# Altium PCB нижняя плата версия 5.PcbDoc
Units mm, origin at the board's own origin, x right, y up, seen from the top; angles counter-clockwise.
Board outline 57.07 x 52.6 mm, 4 copper layers (Top Layer, Layer 1, Layer 2, Bottom Layer), stack 0.603 mm thick; 96 components, 99 nets, 513 pads, 141 vias.
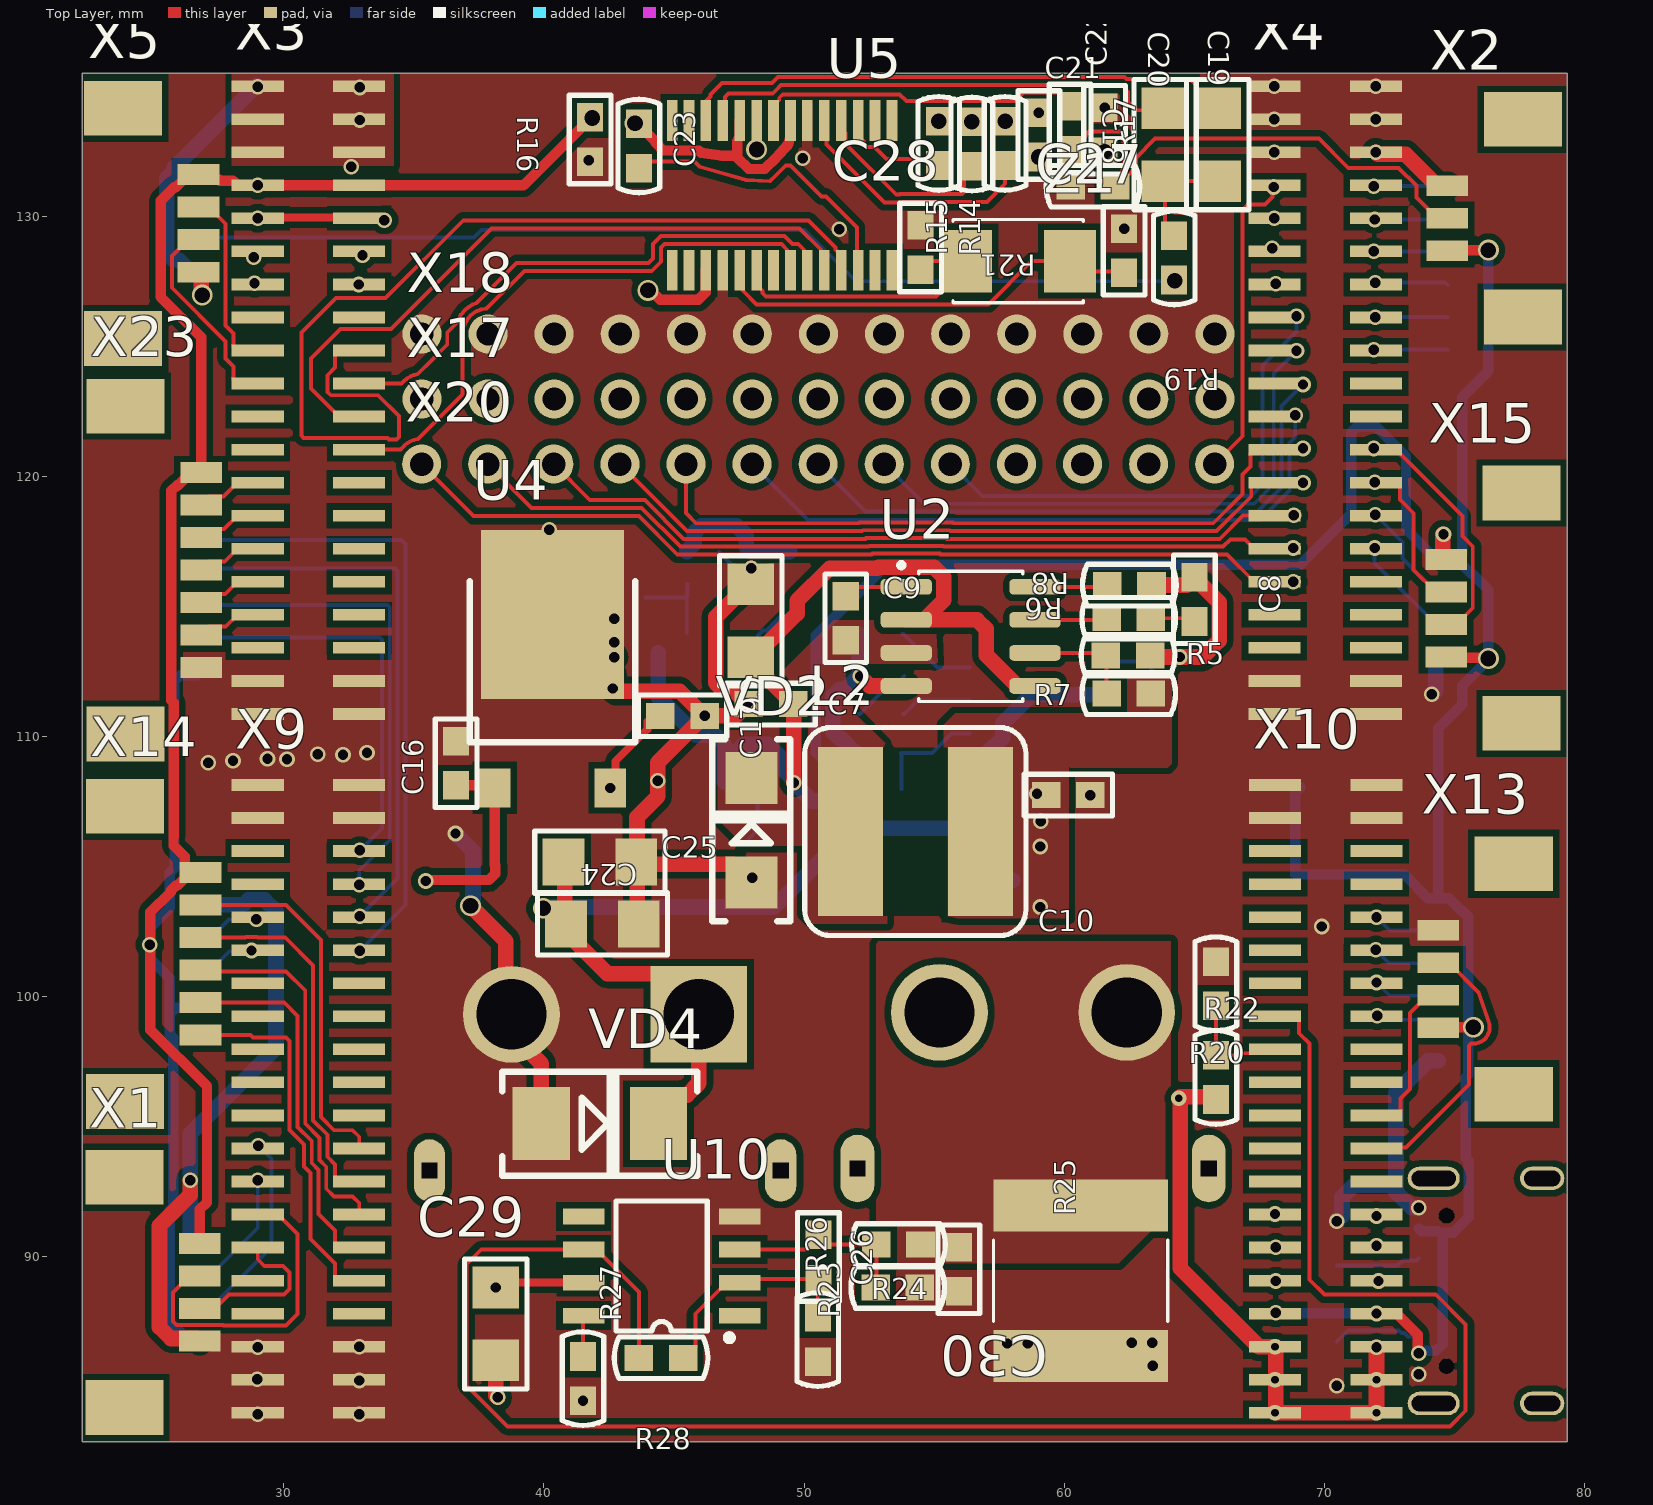
[diagram p0: Top Layer view]
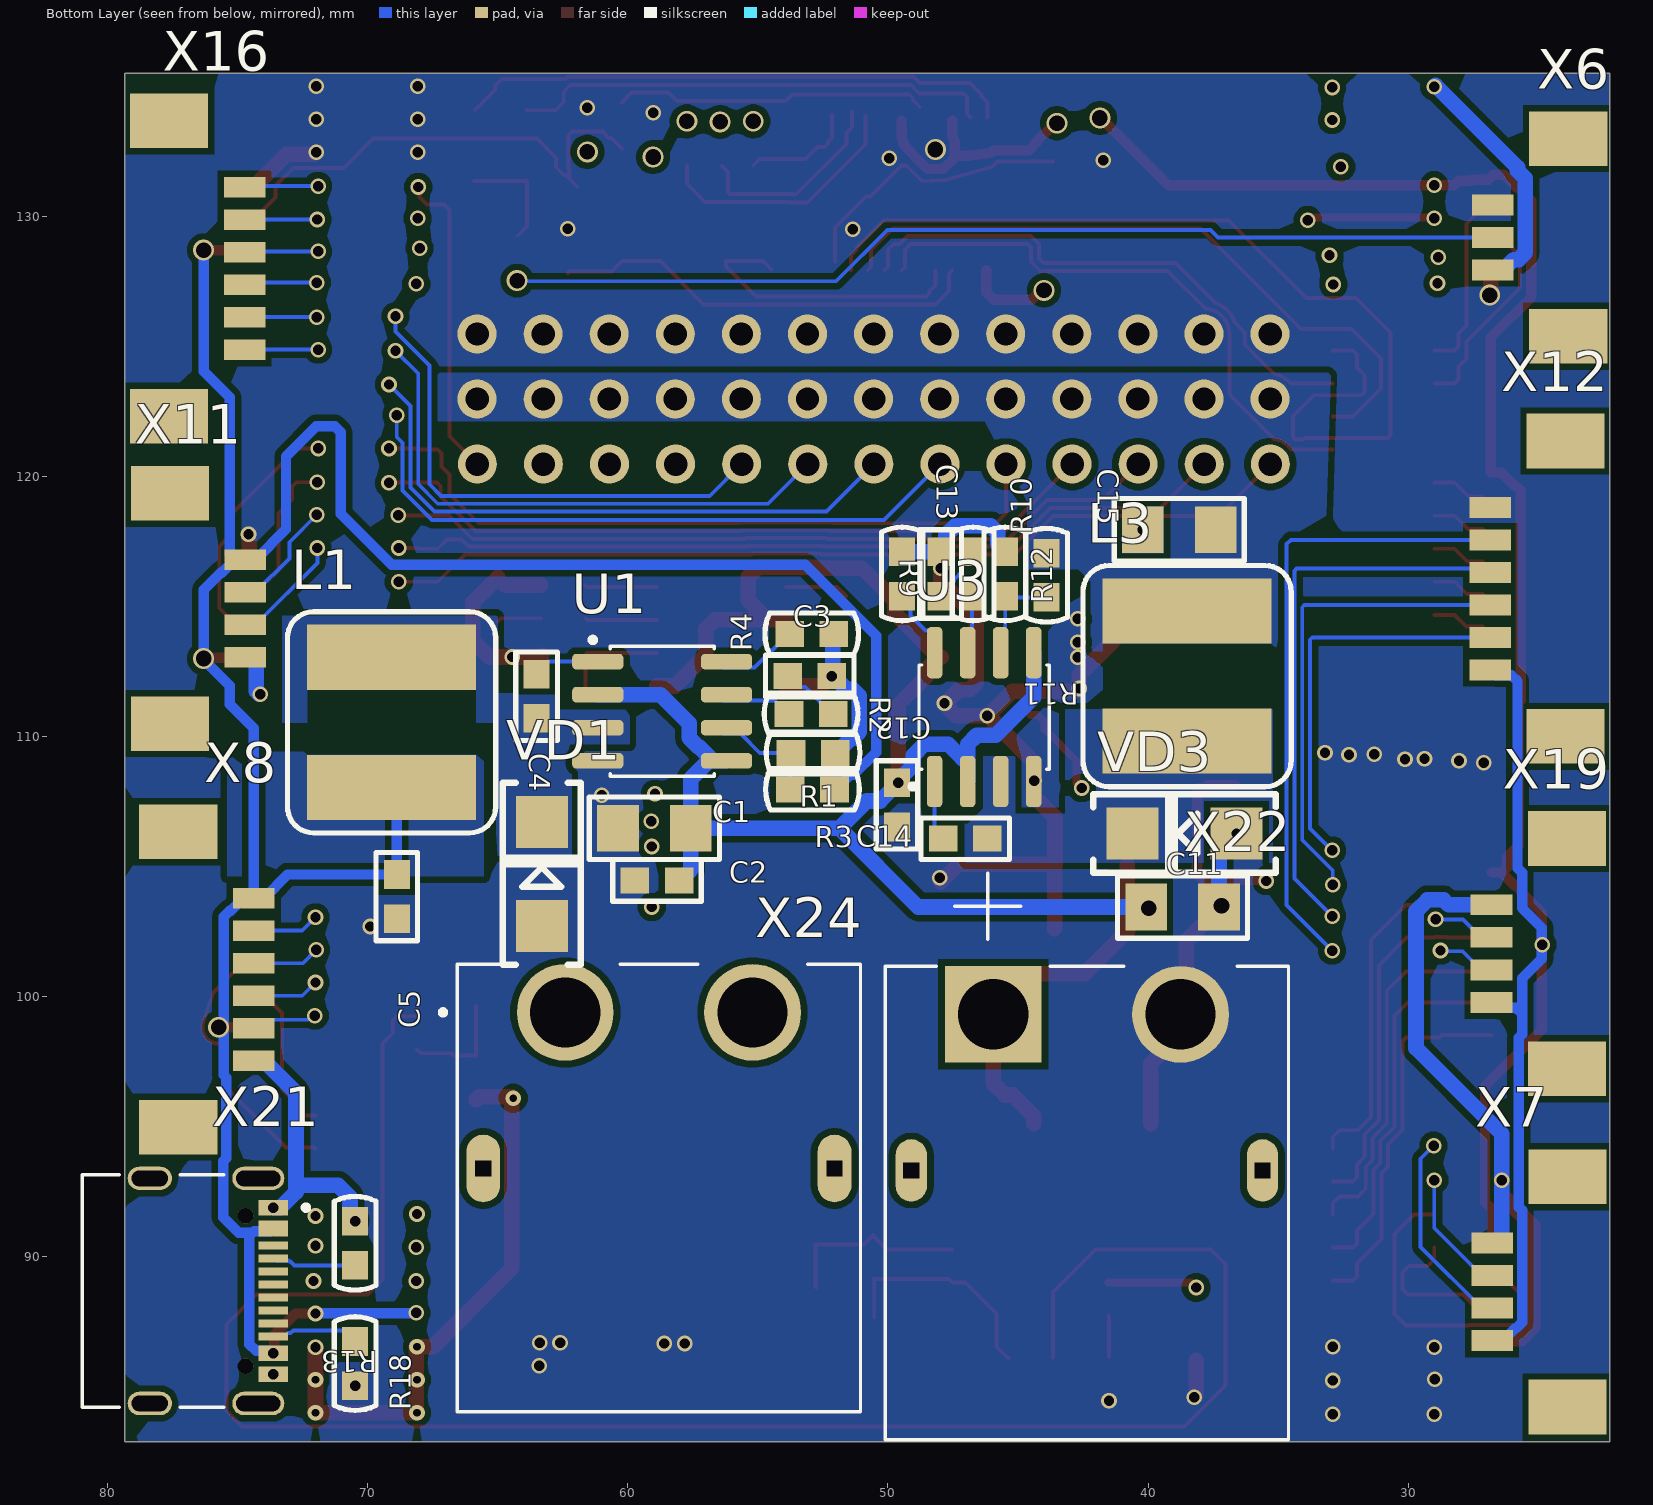
[diagram p1: Bottom Layer view, seen from below]
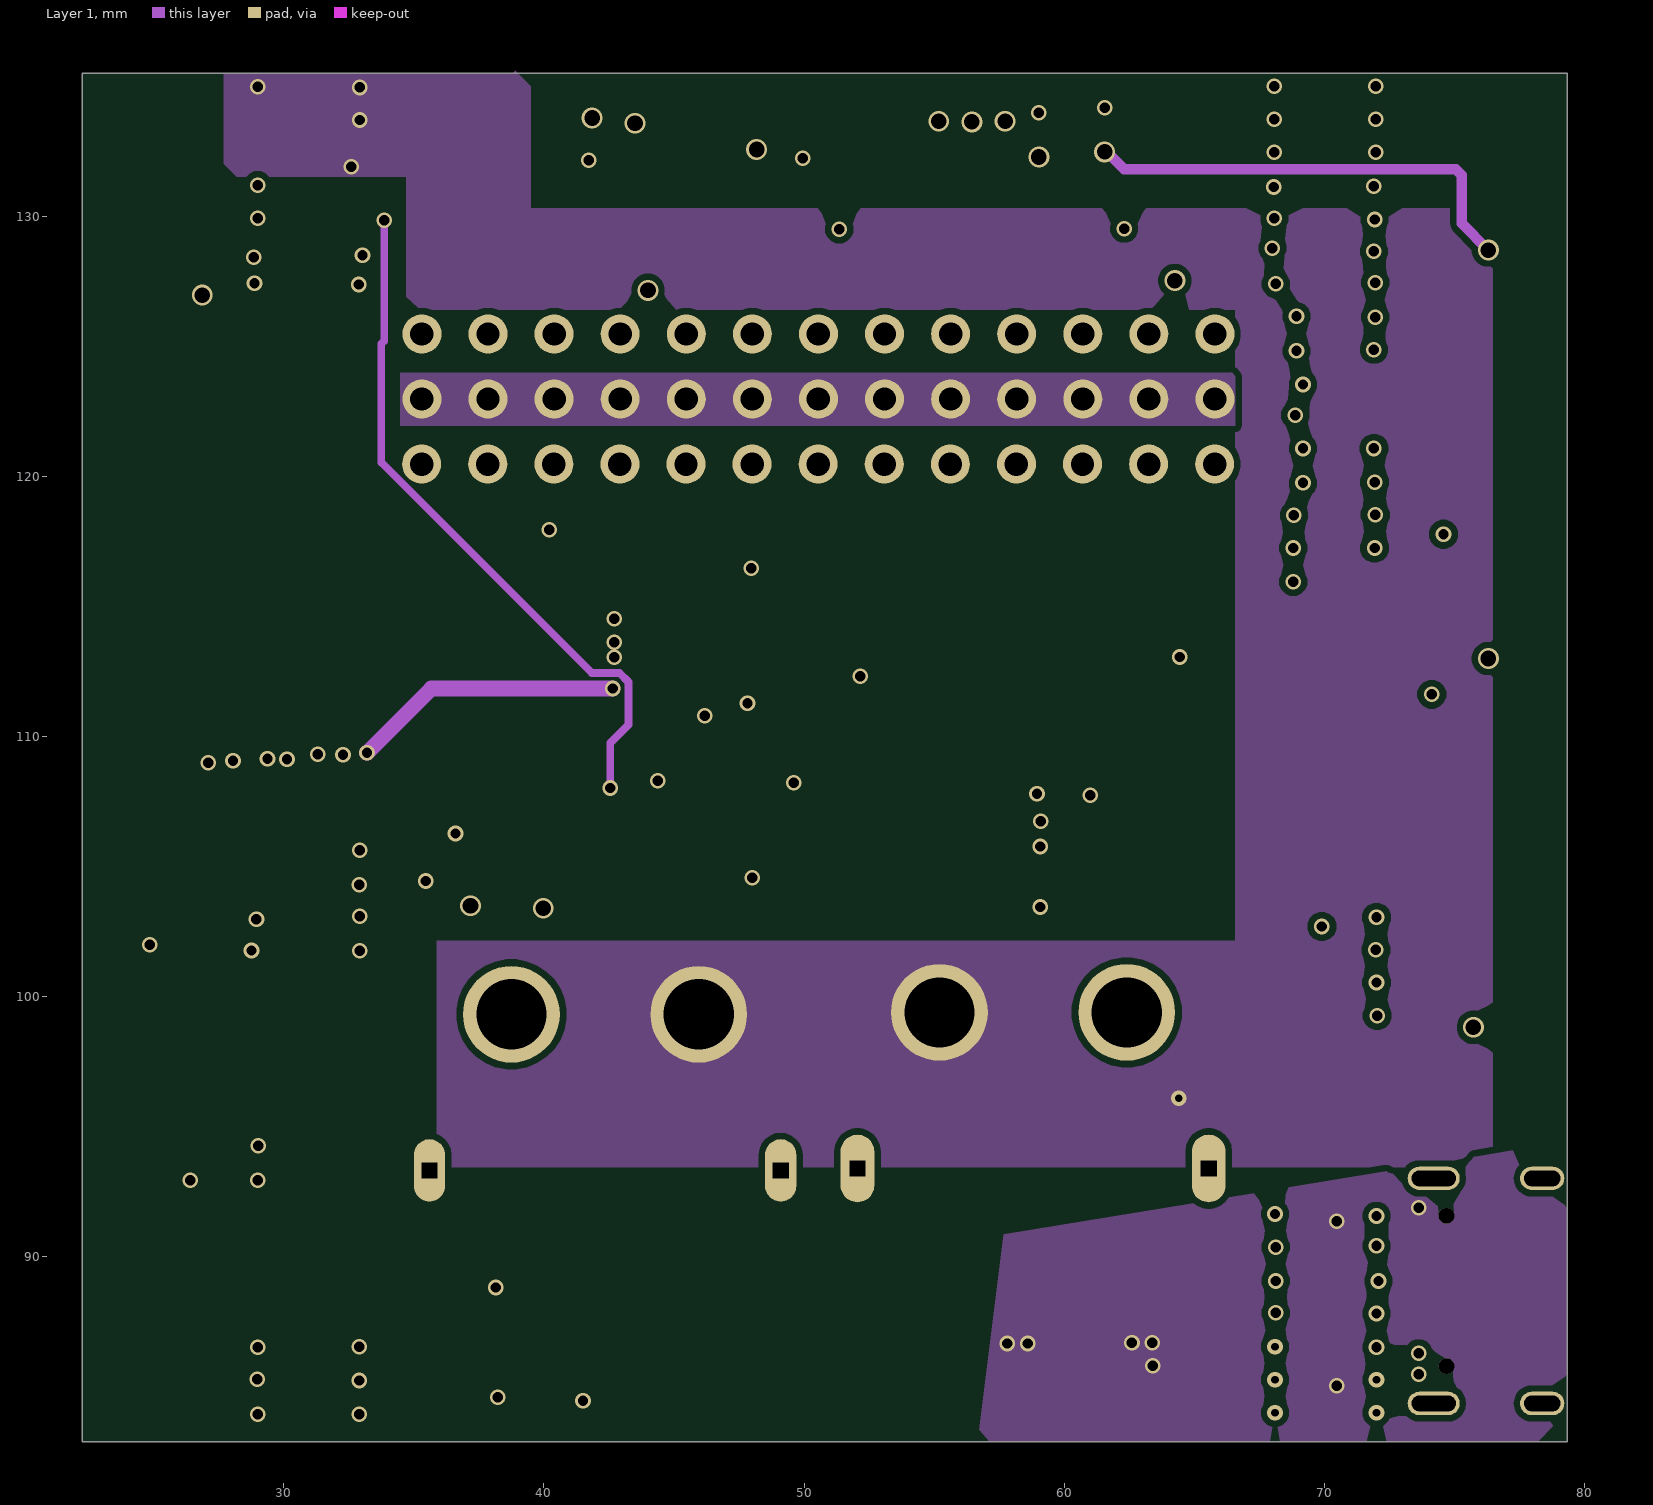
[diagram p2: Layer 1]
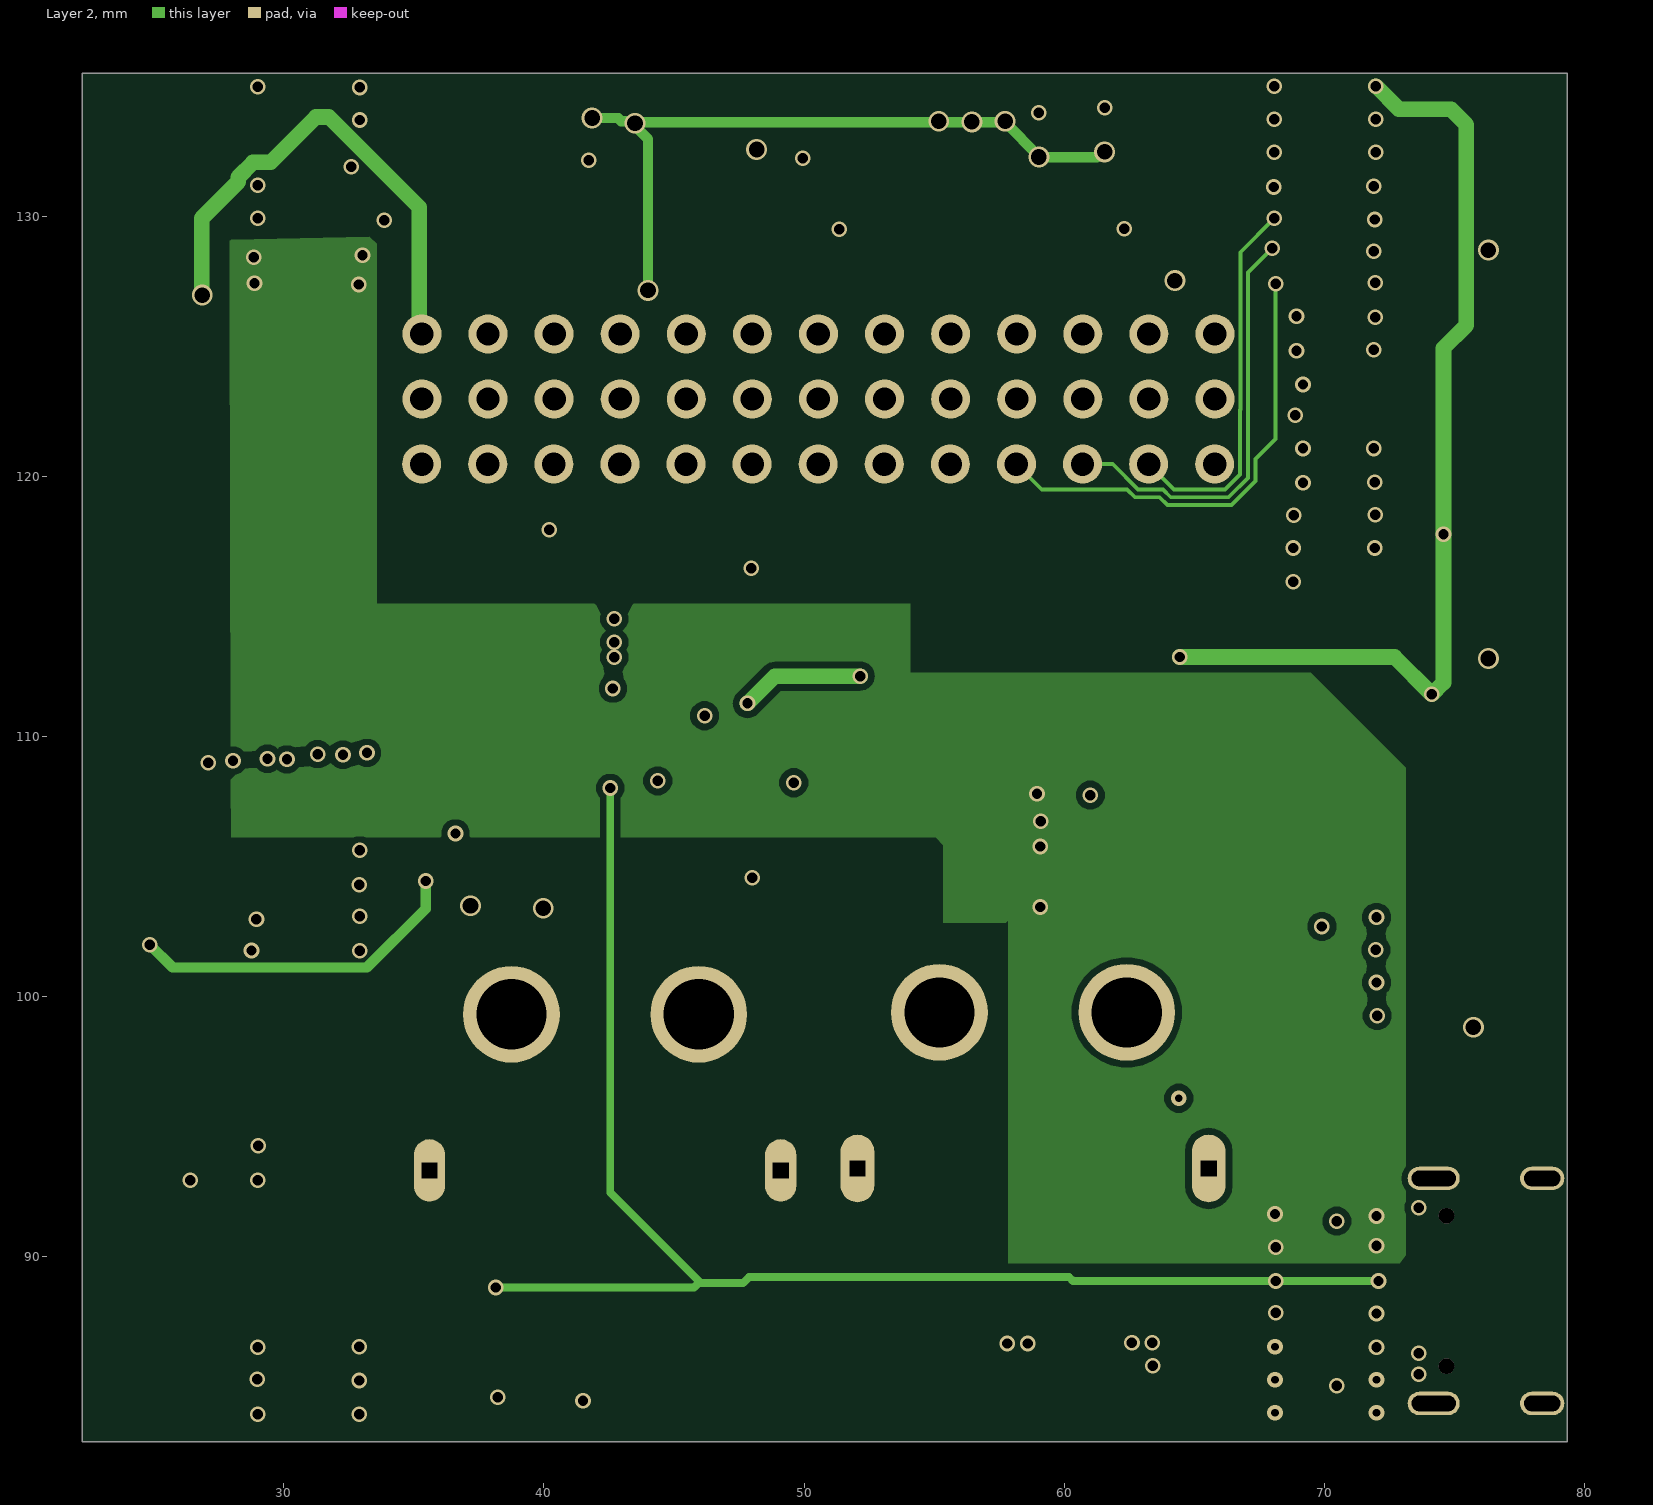
[diagram p3: Layer 2]
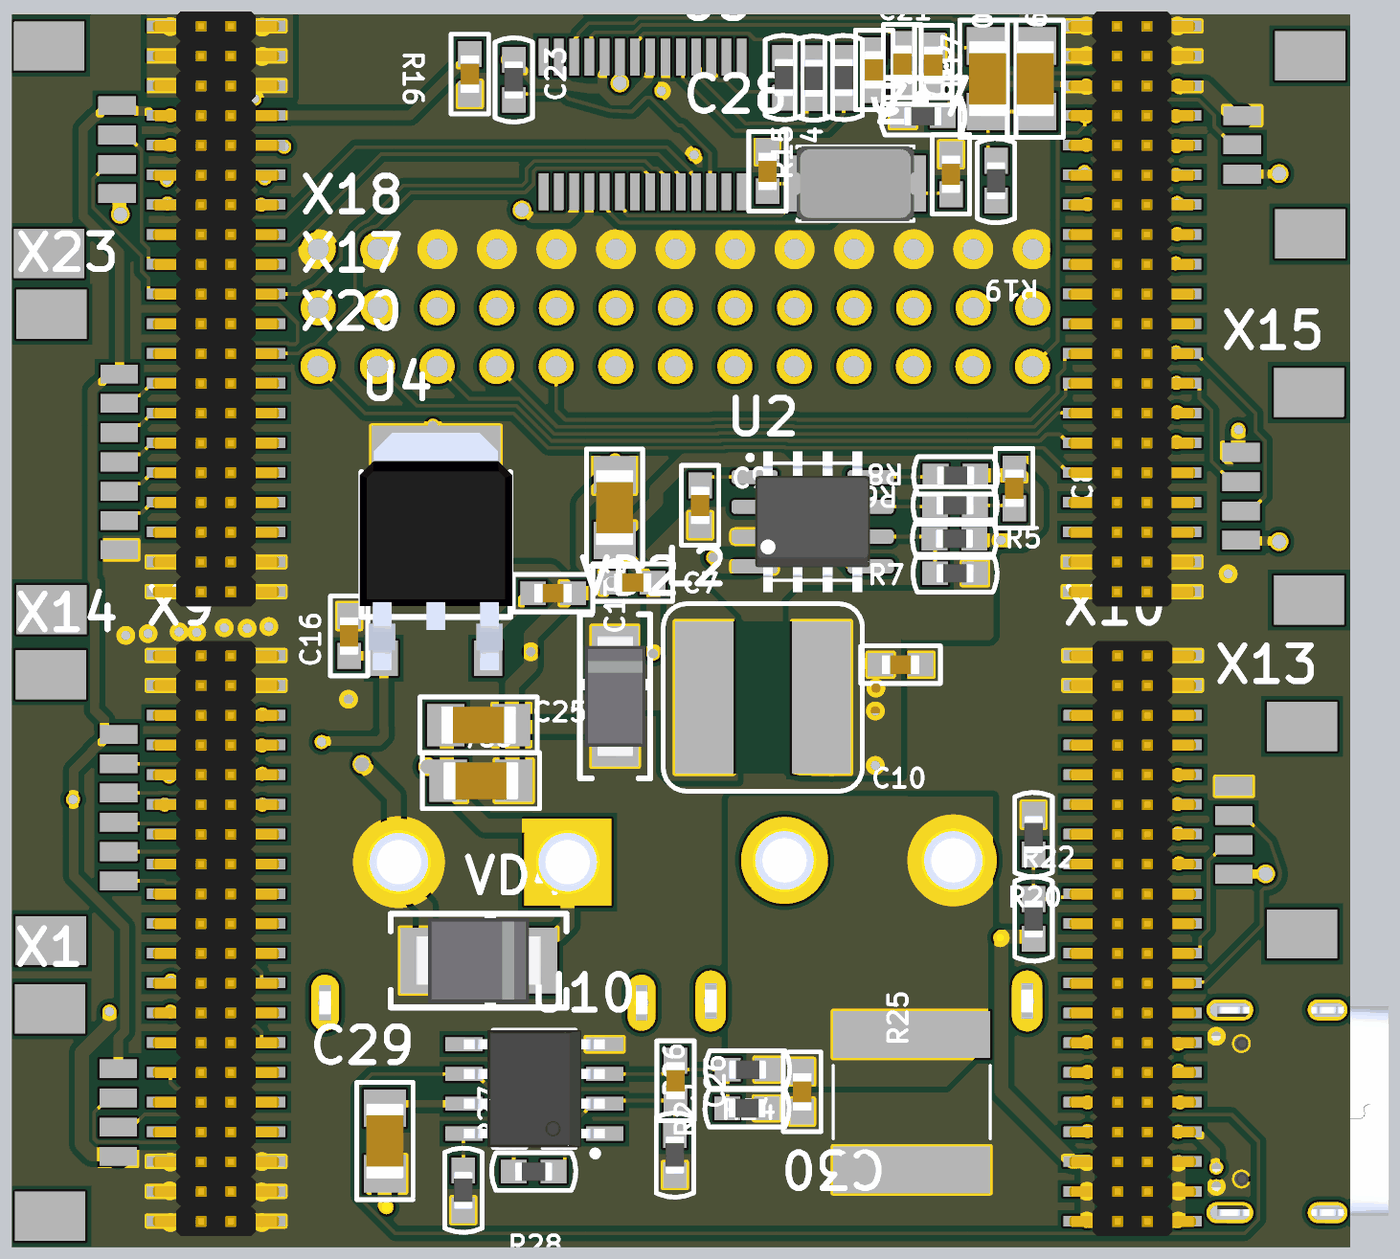
[diagram p4: 3D render of the assembled board from above, using the file's embedded part models]
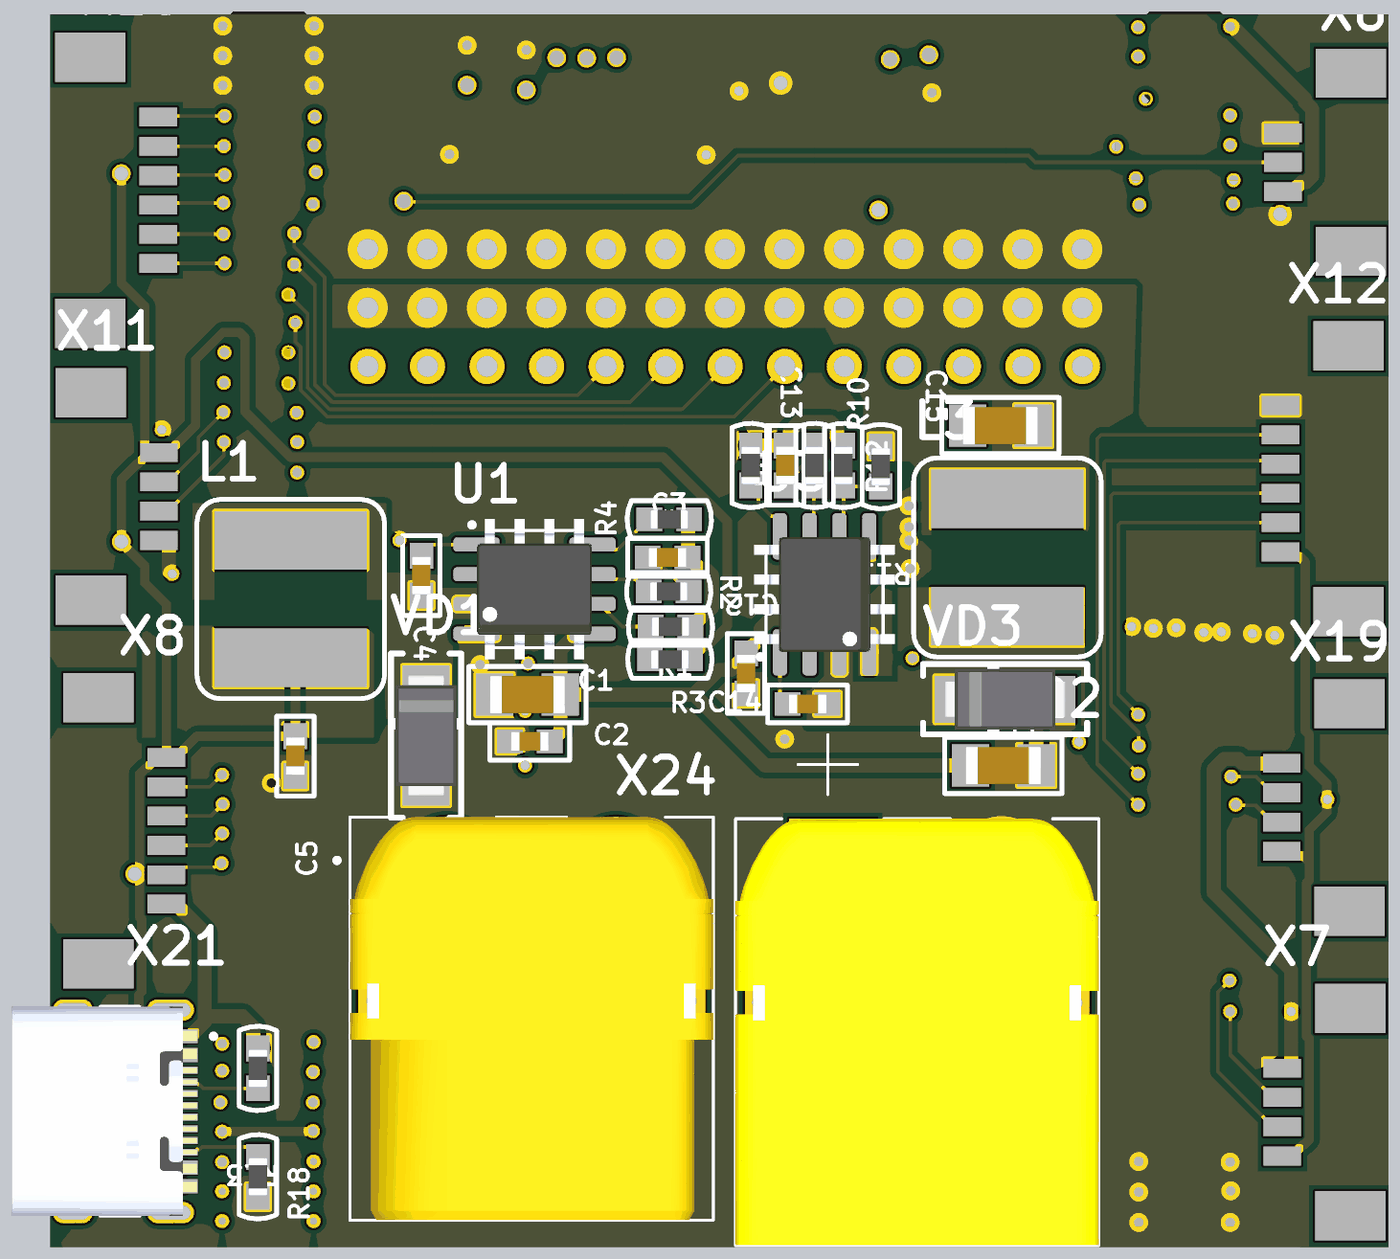
[diagram p5: 3D render of the assembled board from below, using the file's embedded part models]

## Layer stack, top to bottom
Top Solder: solder mask 0.0102, Solder Resist, Dk 3.5
Top Layer: signal copper 0.0356
Dielectric 2: prepreg 0.0711, PP-006, Dk 4.1
Layer 1: signal copper 0.035
Dielectric 1: dielectric 0.32, FR-4, Dk 4.8
Layer 2: signal copper 0.035
Dielectric 3: prepreg 0.0711, PP-006, Dk 4.1
Bottom Layer: signal copper 0.0356
Bottom Solder: solder mask 0.0102, Solder Resist, Dk 3.5

## Board outline
76.3,135.5 73.85,135.5 22.25,135.5 22.25,82.9 79.325,82.9 79.325,135.5

## Design rules (kind name [scope] priority, off if disabled: settings)
Clearance [All] p1: gap=0.15 ignorepadtopadclearanceinfootprint=FALSE except(0: Arc-Hole Track-Region Track-Hole SMDPad-Hole THPad-Hole Via-Hole Fill-Hole Poly-Hole Region-Hole Text-Hole; 0.25: Arc-Fill Arc-Poly Track-Fill Track-Poly SMDPad-Fill SMDPad-Poly THPad-Fill THPad-Poly Via-Fill Via-Poly Fill-Fill Fill-Poly Poly-Poly)
PolygonConnect [All] p1: connectstyle=Direct reliefconductorwidth=0.254 reliefentries=4 polygonreliefangle="90 Angle" airgapwidth=0.254
RoutingVias [All] p1: holewidth=0.4 width=0.6 viastyle="Through Hole" minholewidth=0.4 minwidth=0.6 maxholewidth=0.4 maxwidth=0.6
SolderMaskExpansion [All] p1: expansion=0.102 istentingtop=FALSE
Width Width_6 [InNet('SERVO')] p1: maxlimit=0.6 minlimit=0.6 preferedwidth=0.6 minimp=50.000000 maximp=50.000000 favimp=50.000000
Width Width_5 [InNet('VCC')] p2: maxlimit=0.6 minlimit=0.6 preferedwidth=0.6 minimp=50.000000 maximp=50.000000 favimp=50.000000
Width Width_4 [InNet('GND')] p3: maxlimit=0.7 minlimit=0.6 preferedwidth=0.6 minimp=50.000000 maximp=50.000000 favimp=50.000000
Width Width_3 [InNet('5V')] p4: maxlimit=1 minlimit=0.4 preferedwidth=0.4 minimp=50.000000 maximp=50.000000 favimp=50.000000
Width Width_2 [InNet('4V2')] p5: maxlimit=0.4 minlimit=0.4 preferedwidth=0.4 minimp=50.000000 maximp=50.000000 favimp=50.000000
Width Width_1 [InNet('3V3')] p6: maxlimit=0.3 minlimit=0.3 preferedwidth=0.3 minimp=50.000000 maximp=50.000000 favimp=50.000000
Width [All] p7: maxlimit=0.6 minlimit=0.15 preferedwidth=0.15 minimp=50.000000 maximp=50.000000 favimp=50.000000
30 further rules are at their usual default settings.

## Components (designator, comment, footprint, x,y, rotation, side; value= is the part's Value field where it differs from the comment)
C1 "4u7" C1206 58.975,106.475 r180 bottom
C2 "100n" C0603 58.875,104.475 r180 bottom
C3 "220p" C0603 53,112.325 r180 bottom
C4 "100n" C0603 63.5,111.55 r90 bottom
C5 "22u" C0603 68.875,103.85 r90 bottom
C6 "4u7" C1206 47.95,114.45 r270 top
C7 "100n" C0603 48.725,111.25 r0 top
C8 "220p" C0603 65,115.275 r90 top
C9 "100n" C0603 51.6,114.55 r90 top
C10 "22u" C0603 60.15,107.75 r180 top
C11 "4u7" C1206 38.675,103.45 r0 bottom
C12 "100n" C0603 49.65,107.375 r90 bottom
C13 "220p" C0603 47.975,116.25 r90 bottom
C14 "100n" C0603 47.025,106.075 r0 bottom
C15 "22u" C1206 38.8,117.95 r180 bottom
C16 "" C0603 36.625,108.975 r270 top
C17 "" C0603 45.325,110.8 r180 top
C18 "" C0603 60.225,133.375 r90 top
C19 "22u" C1206 65.9,132.75 r90 top
C20 "22u" C1206 63.875,132.75 r90 top
C21 "100n" C0603 59.025,133.125 r90 top
C22 "100n" C0603 61.55,133.325 r90 top
C23 "100n" C0603 41.775,132.95 r270 top
C24 "22u" C1206 42.25,102.8 r180 top
C25 "22u" C1206 42.15,105.175 r180 top
C26 "100n" C0603 50.55,90 r270 top
C27 "100n" C0603 62.3,128.675 r270 top
C28 "100n" C0603 54.475,128.8 r270 top
C29 "22u" C1206 38.15,87.425 r90 top
C30 "100n" C0603 55.95,89.525 r270 top
L1 "4u7" МИ-3 69.075,110.55 r270 bottom
L2 "4u7" МИ-3 54.275,106.35 r0 top
L3 "4u7" МИ-3 38.5,112.325 r90 bottom
R1 "23K7" R0603 52.875,109.375 r180 bottom
R2 "133K" R0603 52.95,110.875 r180 bottom
R3 "124K" R0603 52.9,107.975 r0 bottom
R4 "57K6" R0603 52.925,113.95 r0 bottom
R5 "29K4" R0603 62.45,113.125 r0 top
R6 "113K" R0603 62.475,114.55 r0 top
R7 "124K" R0603 62.475,111.65 r180 top
R8 "57.6" R0603 62.5,115.825 r180 top
R9 "23K7" R0603 45.5,116.25 r90 bottom
R10 "113K" R0603 46.725,116.25 r90 bottom
R11 "124K" R0603 43.9,116.2 r270 bottom
R12 "57.6" R0603 49.45,116.25 r270 bottom
R13 "" R0603 70.475,90.525 r90 bottom
R14 "1K" R0603 56.45,132.775 r270 top
R15 "1K" R0603 55.175,132.8 r270 top
R16 "1K" R0603 43.65,132.7 r270 top
R17 "75" R0603 61.1,131.15 r0 top
R18 "" R0603 70.475,85.9 r270 bottom
R19 "75" R0603 64.225,128.4 r270 top
R20 "10K" R0603 65.825,100.5 r90 top
R21 "10K" R0603 57.725,132.8 r90 top
R22 "100K" R0603 65.825,96.9 r90 top
R23 "1K" R0603 53.6,88.825 r180 top
R24 "1K" R0603 53.625,90.475 r0 top
R25 "0R001" RESC6864X114N 60.625,89.086 r90 top
R26 "1K" R0603 50.525,86.825 r270 top
R27 "1K" R0603 41.5,85.325 r270 top
R28 "1K" R0603 44.5,86.125 r180 top
U1 "MIK45419PS8RG" SOIC127P600X170-9N 58.675,110.975 r180 bottom value=MP1584EN
U2 "MIK45419PS8RG" SOIC127P600X170-9N 56.4,113.85 r0 top value=MP1584EN
U3 "MIK45419PS8RG" SOIC127P600X170-9N 46.3,110.75 r90 bottom value=MP1584EN
U4 "КФ1158Н3.3В" SOT-428 40.328,112.788 r0 top
U5 "AT7456" at7456 49.699,130.719 r90 top
U10 "IL1776C" SOIC-8 44.525,89.65 r90 top
VD1 "SS3P4" DO-214AC 63.3,104.725 r90 bottom
VD2 "SS3P4" DO-214AC 47.975,106.4 r90 top
VD3 "SS3P4" DO-214AC 38.6,106.275 r0 bottom
VD4 "" DO-214AA 42.15,95.125 r0 top
X1 "Molex Picoblade 0532610471" "PicoBlade 4pin" 25.25,88.675 r270 top
X2 "Molex Picoblade 0532610371" "PicoBlade 3pin" 77.375,129.965 r90 top
X3 "PLLD-1.27-40S" "Headr 2x20 male" 30.947,123.149 r0 top
X4 "PLLD-1.27-40S" "Headr 2x20 male" 70.022,123.149 r0 top
X5 "Molex Picoblade 0532610471" "PicoBlade 4pin" 25.2,129.76 r270 top
X6 "Molex Picoblade 0532610371" "PicoBlade 3pin" 24.1,129.225 r90 bottom
X7 "Molex Picoblade 0532610471" "PicoBlade 4pin" 25.25,88.625 r90 bottom
X8 "Molex Picoblade 0532610671" "PicoBlade 6pin" 76.025,100.725 r270 bottom
X9 "PLLD-1.27-40S" "Headr 2x20 male" 30.947,96.289 r0 top
X10 "PLLD-1.27-40S" "Headr 2x20 male" 70.047,96.289 r0 top
X11 "Molex Picoblade 0532610471" "PicoBlade 4pin" 76.225,114.96 r270 bottom
X12 "Molex Picoblade 0532610671" "PicoBlade 6pin" 25.2,115.625 r90 bottom
X13 "Molex Picoblade 0532610471" "PicoBlade 4pin" 75.9,100.65 r90 top
X14 "Molex Picoblade 0532610671" "PicoBlade 6pin" 25.15,101.71 r270 top
X15 "Molex Picoblade 0532610471" "PicoBlade 4pin" 76.2,114.9 r90 top
X16 "Molex Picoblade 0532610671" "PicoBlade 6pin" 76.375,128.05 r270 bottom
X17 "" SERV 50.677,122.975 r180 top locked
X18 "" SERV 50.677,125.475 r180 top locked
X19 "Molex Picoblade 0532610471" "PicoBlade 4pin" 25.275,101.625 r90 bottom
X20 "" SERV 50.667,120.475 r180 top locked
X21 "TYPE-C-31-M-12" HRO_TYPE-C-31-M-12 78.369,88.695 r270 bottom
X22 "Amass XT-60-PW-M" AMASS_XT60PW-M 42.35,93.325 r0 bottom
X23 "Molex Picoblade 0532610771" "PicoBlade 7pin" 26.8,116.435 r270 top
X24 "Amass XT-60-PW-F" AMASS_XT60PW-F 58.8,99.4 r180 bottom
Z1 "27MHz" XTAL_NX5032GA-8.000M-STD-CSU-1 58.225,128.275 r0 top

## Footprints (in the part's own frame and the unit in brackets; to place one, negate y for a bottom-side part, rotate by r counter-clockwise, add the part's x,y. Pads: shape width x height; smd on the part's side, far side on the other; paste and mask are expansions set on the pad)
AMASS_XT60PW-F [mm]
  round 3.716 hole 2.7: 1(-3.6,0) 2(3.6,0)
  oval 1.3x2.6 hole 0.6 square: S1(-6.75,-6) S2(6.75,-6)
  silkscreen extent -8.4,-15.35 7.75,1.85, body extent -7.75,-15.35 7.75,1.85, height 8.4
AMASS_XT60PW-M [mm]
  rect 3.716x3.716 / inner round 3.716 / far side rect 3.716x3.716 hole 2.7: 1(3.6,-6)
  round 3.716 hole 2.7: 2(-3.6,-6)
  oval 1.2x2.4 hole 0.6 square: S1(6.75,0) S2(-6.75,0)
  silkscreen extent -7.75,-11.43 7.75,10.35, body extent -7.75,-7.85 7.75,10.35, height 8.4
at7456 [mm]
  rect 1.57x0.41 smd: 1(-2.794,4.774) 2(-2.794,4.124) 3(-2.794,3.474) 4(-2.794,2.824) 5(-2.794,2.174) 6(-2.794,1.524) 7(-2.794,0.874) 8(-2.794,0.224) 9(-2.794,-0.426) 10(-2.794,-1.076) 11(-2.794,-1.726) 12(-2.794,-2.376) 13(-2.794,-3.026) 14(-2.794,-3.676) 15(2.956,-3.676) 16(2.956,-3.026) 17(2.956,-2.376) 18(2.956,-1.726) 19(2.956,-1.076) 20(2.956,-0.426) 21(2.956,0.224) 22(2.956,0.874) 23(2.956,1.524) 24(2.956,2.174) 25(2.956,2.824) 26(2.956,3.474) 27(2.956,4.124) 28(2.956,4.774)
C0603 [mm] "1608M"
  rect 1.1x1 smd: 1(-0.85,0) 2(0.85,0)
  silkscreen extent -1.7,-0.8 1.7,0.8, body extent -0.8,-0.4 0.8,0.4, height 0.91
C1206 [mm] "3216M"
  rect 1.6x1.8 smd: 1(-1.4,0) 2(1.4,0)
  silkscreen extent -2.5,-1.2 2.5,1.2, body extent -1.6,-0.8 1.6,0.8, height 1.01
DO-214AA [mm] "(SMB) Low profile package"
  rect 2.2x2.8 smd: 1(-2.25,0) 2(2.25,0)
  silkscreen extent -3.75,-2 3.75,2, body extent -2.7,-1.8 2.7,1.8, height 2.3
DO-214AC [mm] "(SMA) Low profile package"
  rect 2x2 smd: 1(-2,0) 2(2,0)
  silkscreen extent -3.5,-1.5 3.5,1.5, body extent -2.6,-1.3 2.6,1.3, height 2.4
"Headr 2x20 male" [mm]
  rect 2x0.45 smd: 1(-1.947,11.851) 2(1.953,11.851) 3(-1.947,10.581) 4(1.953,10.581) 5(-1.947,9.311) 6(1.953,9.311) 7(-1.947,8.041) 8(1.953,8.041) 9(-1.947,6.771) 10(1.953,6.771) 11(-1.947,5.501) 12(1.953,5.501) 13(-1.947,4.231) 14(1.953,4.231) 15(-1.947,2.961) 16(1.953,2.961) 17(-1.947,1.691) 18(1.953,1.691) 19(-1.947,0.421) 20(1.953,0.421) 21(-1.947,-0.849) 22(1.953,-0.849) 23(-1.947,-2.119) 24(1.953,-2.119) 25(-1.947,-3.389) 26(1.953,-3.389) 27(-1.947,-4.659) 28(1.953,-4.659) 29(-1.947,-5.929) 30(1.953,-5.929) 31(-1.947,-7.199) 32(1.953,-7.199) 33(-1.947,-8.469) 34(1.953,-8.469) 35(-1.947,-9.739) 36(1.953,-9.739) 37(-1.947,-11.009) 38(1.953,-11.009) 39(-1.947,-12.279) 40(1.953,-12.279)
  body extent -2.7,-12.93 2.7,12.47, height 4.46
HRO_TYPE-C-31-M-12 [mm]
  rect 0.6x1.14 smd mask+0.05: A1_B12(-3.2,4.75) A4_B9(-2.4,4.75) B1_A12(3.2,4.75) B4_A9(2.4,4.75)
  rect 0.3x1.14 smd mask+0.05: A5(-1.25,4.75) A6(-0.25,4.75) A7(0.25,4.75) A8(1.25,4.75) B5(1.75,4.75) B6(0.75,4.75) B7(-0.75,4.75) B8(-1.75,4.75)
  oval 0.9x2 hole 0.6 slot 1.7 at 90 deg: S1(-4.325,4.17) S2(4.325,4.17)
  oval 0.9x1.7 hole 0.6 slot 1.4 at 90 deg: S3(-4.325,0) S4(4.325,0)
  round 0.6 hole 0.6 unplated: ""(-2.89,3.68) ""(2.89,3.68)
  silkscreen extent -4.47,-2.6 4.47,6.1, body extent -4.47,-2.6 4.47,5.31, height 3.31
"PicoBlade 3pin" [mm]
  rect 0.8x1.6 smd: 1(-1.29,2.65) 2(-0.04,2.65) 3(1.21,2.65)
  rect 2.1x3 smd: S(-3.84,-0.25) S(3.76,-0.25)
"PicoBlade 4pin" [mm]
  rect 0.8x1.6 smd: 1(-1.84,1.525) 2(-0.59,1.525) 3(0.66,1.525) 4(1.91,1.525)
  rect 2.1x3 smd: S(-4.39,-1.375) S(4.46,-1.375)
"PicoBlade 6pin" [mm]
  rect 0.8x1.6 smd: 1(-3.065,1.65) 2(-1.815,1.65) 3(-0.565,1.65) 4(0.685,1.65) 5(1.935,1.65) 6(3.185,1.65)
  rect 2.1x3 smd: S(-5.615,-1.25) S(5.735,-1.25)
"PicoBlade 7pin" [mm]
  rect 0.8x1.6 smd: 1(-3.715,0.025) 2(-2.465,0.025) 3(-1.215,0.025) 4(0.035,0.025) 5(1.285,0.025) 6(2.535,0.025) 7(3.785,0.025)
  rect 2.1x3 smd: S(-6.265,-2.875) S(6.335,-2.875)
R0603 [mm] "1608M"
  rect 1.1x1 smd: 1(-0.85,0) 2(0.85,0)
  silkscreen extent -1.8,-0.8 1.8,0.8, body extent -0.8,-0.4 0.8,0.4, height 0.38
RESC6864X114N [mm]
  rect 2x6.71 smd: 1(-2.886,0) 2(2.886,0)
  silkscreen extent -1.56,-3.35 1.56,3.35
SERV [mm]
  round 1.5 hole 0.9: 1(-15.113,0) 2(-12.573,0) 3(-10.033,0) 4(-7.493,0) 5(-4.953,0) 6(-2.413,0) 7(0.127,0) 8(2.667,0) 9(5.207,0) 10(7.747,0) 11(10.287,0) 12(12.827,0) 13(15.367,0)
SOIC127P600X170-9N [mm]
  rrect54% 1.97x0.6 smd: 1(-2.475,1.905) 2(-2.475,0.635) 3(-2.475,-0.635) 4(-2.475,-1.905) 5(2.475,-1.905) 6(2.475,-0.635) 7(2.475,0.635) 8(2.475,1.905)
  silkscreen extent -2.77,-2.5 2,2.84, body extent -2.45,-3 2.45,3, height 1.7
SOIC-8 [mm] "4320.8-А Small Outline; 8 Leads; Body Width 3.9 mm; Pitch 1.27 mm"
  rect 0.6x1.6 smd: 1(-1.905,-3) 2(-0.635,-3) 3(0.635,-3) 4(1.905,-3) 5(1.905,3) 6(0.635,3) 7(-0.635,3) 8(-1.905,3)
  silkscreen extent -2.88,-2.72 2.5,1.75, body extent -2.5,-3.01 2.5,3.01, height 1.75
SOT-428 [mm] "КТ-89, DPAK, TO-252"
  rect 1.2x1.5 smd: 1(-2.222,-4.763) 3(2.222,-4.763)
  rect 5.5x6.5 smd: 2(0,1.905)
  silkscreen extent -3.17,-3 3.17,3.17, body extent -3.25,-5.28 3.25,4.86, height 2.43
XTAL_NX5032GA-8.000M-STD-CSU-1 [mm]
  rect 2x2.4 smd: 1(-2,0) 2(2,0)
  silkscreen extent -2.5,-1.6 2.5,1.6, body extent -2.5,-1.6 2.5,1.6, height 1.5
МИ-3 [mm]
  rect 2.5x6.5 smd: 1(-2.5,0) 2(2.5,0)
  Top Layer pour cut-out: -1.25,3.25 1.25,3.25 1.25,-3.25 -1.25,-3.25
  silkscreen extent -4.25,-4 4.25,4

## Part data
C1 C2 C3 C4 C5 C6 C7 C8 C9 C10 C11 C12 C13 C14 C15 C16 C17 C18 C19 C20 C21 C22 C23 C24 C25 C26 C27 C28 C29 C30: library part C1_POSTOYANNYJ, "Конденсатор постоянной емкости"
L1 L2 L3: library part Inductor, "Описание свойств компонента"
R1 R2 R3 R4 R5 R6 R7 R8 R9 R10 R11 R12 R13 R14 R15 R16 R17 R18 R19 R20 R21 R22 R23 R24 R25 R26 R27 R28: library part R1_POSTOYANNYJ, "Резистор постоянный", Simulation ModelName=Resistors, Simulation PortMap=(1:1),(2:2)
U1 U2 U3: library part MP1584EN, "DC-DC"
U4: library part КФ1158Н, "LDO"
U5: "OSD"
VD1 VD2 VD3: library part Diode, Published=18.05.2010, Publisher="Andrew Danich", Type=Диод
VD4: library part Schottky, Published=18.05.2010, Publisher="Andrew Danich", Type=Диод
X1 X5 X7 X11 X13 X15 X19: library part "Header 1x4"
X2 X6: library part "Header 1x3"
X3 X4 X9 X10: library part "Header 2x20"
X8 X12 X14 X16: library part "Header 1x6"
X17 X18 X20: library part SERVO
X22 X24: library part XT60PW-M
X23: library part "Header 1x7"
Z1: library part KX-38T

## Via types
v1: diameter 0.6, hole 0.4, Top Layer to Bottom Layer, 119 vias
v2: diameter 0.8, hole 0.6, Top Layer to Bottom Layer, 16 vias
v3: diameter 0.6, hole 0.3, Top Layer to Bottom Layer, 6 vias

## Nets (pads, with @x,y where several pads share a name; then routed paths per layer and width w, separated by ;. In a path a pad name is that pad's centre, name@x,y a point inside that pad or via, vN(x,y) a via of type N, cw(c..) or ccw(c..) an arc to the next point about the centre after c; other vN are vias at no path point)
3V3: C17.2 C29.2 U4.3 U10.7 X3.9 X3.10 X10.31 X10.32 | length 93.5
  Top Layer w0.3: v1(29,129.925) 29.022,129.947 33.723,129.947 33.723,129.929 33.783,129.929 v1(33.861,129.85) ; v1(38.15,88.825) 38.34,89.015 U10.7 ; v1(42.55,108.025) 42.746,108.221 42.746,109.049 43.975,110.278 43.975,110.575 44.225,110.825 C17.2@44.522,110.825
  Layer 1 w0.3: v1(33.861,129.85) 33.861,125.21 33.75,125.099 33.75,120.54 41.84,112.45 42.899,112.45 43.25,112.099 43.25,110.452 42.55,109.752 v1(42.55,108.025)
  Layer 2 w0.3: v1(38.15,88.825) 45.769,88.825 45.944,89 46.025,89 ; v1(42.55,108.025) 42.55,92.475 46.025,89 ; v1(72.075,89.075) v1(68.125,89.075) 60.335,89.075 60.185,89.225 47.881,89.225 47.656,89 46.025,89
4V2: C10.2 L2.2 R7.1 X3.11 X3.12 X3.13 X3.14 X10.27 X10.28 X10.29 X10.30
  other v1: 68.125,90.375 72,90.425 72,91.575 68.1,91.65 59.075,103.45 59.075,105.775 59.1,106.75 58.95,107.8 32.875,127.375 28.875,127.425 28.85,128.425 33.025,128.5
5V: C5.2 C16.2 C21.1 C22.1 C23.1 L1.2 R3.1 R14.1 R15.1 R16.1 R21.2 U4.1 U5.3 U5.21 U5.24 X1.1 X2.1 X3.7 X3.8 X5.1 X7.1 X8.1 X10.33 X10.34 X11.1 X12.1 X13.1 X14.1 X15.1 X19.1 X21.A4_B9 X21.B4_A9 X23.1 | length 277.3
  Top Layer w0.4: X1.1 26.775,91.83 27.05,92.105 27.05,96.555 24.875,98.73 24.875,103.25 25.65,104.025 25.65,104.07 25.855,104.275 25.9,104.275 X14.1@26.4,104.775 ; X14.1 X14.1@26.4,104.775 ; v1(35.45,104.45) 35.488,104.488 37.888,104.488 38.123,104.723 38.123,105.054 38.102,105.074 38.102,108.022 U4.1 37.705,108.041 37.705,108.125 C16.2 ; v2(41.85,133.775) 41.8,133.775 39.215,131.19 X3.8 v1(29,131.19) 28.225,131.19 28.049,131.366 27.559,131.366 27.525,131.4 26.925,131.4 X5.1 26.325,131.6 25.842,131.117 25.797,131.117 25.275,130.595 25.275,126.895 26.825,125.345 X23.1 26.425,120.15 25.942,119.667 25.897,119.667 25.675,119.445 25.675,111.395 25.775,111.295 25.775,106.155 25.763,106.143 25.763,105.812 26.2,105.375 26.2,104.975 X14.1@26.4,104.775 ; R16.1 43.65,133.5 44.292,132.858 44.292,132.823 44.59,132.525 45.96,132.525 46.042,132.443 46.859,132.326 47.425,132.326 ; v2@44.1,127.125 44.133,127.125 44.468,126.79 45.925,126.79 46.22,127.085 46.22,127.92 U5.3 ; U5.24 47.52,133.09 47.43,132.882 47.43,132.745 47.425,132.74 47.425,132.256 47.864,131.817 48.486,131.817 48.925,132.256 49.38,132.745 49.47,133.09 U5.21 ; v1(72,87.825) 72.77,87.825 73.581,87.014 73.581,86.333 v1(73.619,86.295) ; X13.1 74.975,98.825 v2(75.725,98.825) ; X15.1 74.705,113.03 76.27,113.03 v2(76.3,113) ; X2.1 74.737,128.687 76.288,128.687 v2(76.3,128.7)
  Layer 1 w0.4: v2(61.55,132.475) 61.634,132.475 62.299,131.81 75.041,131.81 75.275,131.576 75.275,129.725 v2(76.3,128.7)
  Layer 2 w0.4: v1(24.85,102) 25.725,101.125 33.194,101.125 35.45,103.381 v1(35.45,104.45) ; v2(41.85,133.775) 42.85,133.775 42.973,133.652 43.423,133.652 v2(43.5,133.575) ; v2(44,127.15) 44,132.967 43.5,133.467 v2(43.5,133.575) ; v2(61.55,132.475) 61.442,132.475 61.242,132.275 v2(59.025,132.275) 59.025,132.313 57.725,133.613 v2(57.725,133.65) 57.687,133.612 43.537,133.612 v2(43.5,133.575)
  Bottom Layer w0.4: X7.1 26.375,86.785 25.892,87.268 25.847,87.268 25.625,87.49 25.625,91.79 25.75,91.915 25.75,98.43 25.625,98.555 25.625,99.351 ; X19.1 26.6,99.585 25.859,99.585 25.625,99.351 ; X12.1 26.65,112.36 26.034,112.36 25.8,112.126 25.8,104.94 25.625,104.765 25.625,103.411 24.875,102.661 24.875,101.454 25.625,100.704 25.625,99.351 ; R3.1 52,107.975 51.45,108.525 51.33,108.525 50.45,109.405 50.45,113.87 53.18,116.6 69.069,116.6 71.025,118.556 71.025,121.691 71.259,121.925 71.969,121.925 73.135,120.76 73.135,117.965 74.3,116.8 X11.1 X11.1@75.1,116.8 ; v1(68.125,87.85) 68.137,87.838 71.988,87.838 v1(72,87.825) ; L1.2 68.875,107.85 C5.2 73.065,104.7 73.975,103.79 X8.1 ; v1(73.619,86.295) 73.719,86.395 74.284,86.395 74.539,86.65 74.539,90.74 ; X21.A4_B9 73.719,90.995 74.36,90.995 74.42,90.935 74.958,90.935 75.549,91.526 75.549,93.671 75.425,93.795 75.425,96.895 75.525,96.995 v2@75.525,98.925 ; v2(75.725,98.825) 75.625,98.825 v2@75.525,98.925 ; v2(76.3,128.7) 76.3,124.035 75.3,123.035 75.3,117 X11.1@75.1,116.8 ; X8.1 74.375,110.32 75.299,111.244 75.299,111.954 76.3,112.955 76.3,115.645 75.645,116.3 75.6,116.3 X11.1@75.1,116.8 ; X8.1 74.775,103.79 75.258,103.307 75.303,103.307 75.525,103.085 v2@75.525,98.925
  other v2: 56.45,133.625 55.175,133.65
GND: C1.1 C2.1 C3.2 C5.1 C6.1 C7.1 C8.2 C10.1 C11.1 C12.1 C13.2 C15.1 C16.1 C17.1 C21.2 C22.2 C23.2 C24.1 C25.1 C27.1 C28.1 C29.1 C30.2 R1.2 R4.1 R5.2 R8.1 R9.2 R12.1 R13.2 R17.1 R18.2 R20.2 R23.1 R25.1 R26.2 R27.2 U1.4 U2.4 U3.4 U4.2 U5.4 U5.20 U5.23 U10.4 VD1.1 VD2.1 VD3.1 VD4.1 X1.4 X2.3 X3.37 X3.38 X3.39 X3.40 X4.1 X4.2 X4.3 X4.4 X4.5 X4.6 X4.37 X4.38 X4.39 X4.40 X5.4 X6.3 X7.4 X8.6 X9.1 X9.2 X9.3 X9.4 X9.35 X9.36 X9.37 X9.38 X9.39 X9.40 X10.1 X10.2 X10.3 X10.4 X11.4 X12.6 X13.4 X15.4 X18.1 X18.2 X18.3 X18.4 X18.5 X18.6 X18.7 X18.8 X18.9 X18.10 X18.11 X18.12 X18.13 X19.4 X21.A1_B12 X21.B1_A12 X22.2 X23.7 | length 178.8
  Top Layer w0.6: v1(26.4,92.95) 26.4,92.374 25.225,91.199 25.225,87.304 25.664,86.865 26.675,86.865 X1.4 ; X5.4 26.729,127.85 26.829,127.75 26.829,127.005 v2(26.867,126.967) ; v2(37.175,103.5) 38.538,102.137 38.538,99.537 X22.2 38.75,98.575 39.9,97.425 VD4.1 ; C29.1 38.15,84.675 v1(38.225,84.6) ; U4.2 U4.2@42.335,112.685 ; v1(42.65,111.85) U4.2@42.65,111.878 ; v1(42.7,113.05) U4.2@42.335,112.685 ; C24.1@43.6,102.625 43.587,102.637 43.587,105.088 C25.1@43.575,105.1 ; C17.1@45.925,111.036 45.211,111.75 42.778,111.75 U4.2@42.65,111.878 ; VD2.1 47.275,105.1 C25.1@43.575,105.1 ; v1(47.975,116.475) 47.975,115.875 C6.1 47.85,115.85 46.6,114.6 46.6,112.064 46.864,111.8 47.275,111.8 47.8,111.275 v1(47.825,111.275) 47.825,111.25 47.375,110.8 v1(46.175,110.8) 46.125,110.8 45.925,110.6 45.925,110.55 44.375,109 v1(44.375,108.3) 44.375,107.7 43.575,106.9 C25.1@43.575,105.1 ; v1(52.15,112.325) 52.53,111.945 U2.4 ; R5.2 63.366,113.059 v1(64.437,113.059) 65.321,113.059 65.95,113.689 65.95,115.161 65.236,115.875 65.2,115.875 65,116.075 C8.2 ; R8.1 C8.2@64.7,115.825 ; v1(71.975,132.46) 72.05,132.385 73.115,132.385 74.325,131.175 X2.3 ; v1@74.55,117.775 74.55,116.91 74.65,116.81 X15.4 ; U4.2@42.335,112.685 42.65,112.37 U4.2@42.65,111.878
  Layer 1 w0.6: v1(33.2,109.375) 35.675,111.85 v1(42.65,111.85)
  Layer 2 w0.6: v2(26.867,126.967) 26.85,126.984 26.85,129.925 28.25,131.325 28.25,131.501 28.817,132.068 29.49,132.068 31.237,133.815 31.735,133.815 35.2,130.35 35.2,125.585 X18.13 ; v1(47.825,111.275) 48.875,112.325 v1(52.15,112.325) ; v1(64.437,113.059) 72.691,113.059 v1(74.125,111.625) 74.575,112.075 v1(74.575,117.775) 74.575,124.93 75.45,125.805 75.45,133.524 74.862,134.112 72.863,134.112 v1(71.975,135)
  Bottom Layer w0.6: X7.4 26.5,90.535 26.4,90.635 v1(26.4,92.95) 26.4,94.725 29.7,98.025 29.7,103.286 29.261,103.725 28.639,103.725 28.449,103.535 X19.4 ; v1(36.6,106.275) 37.275,105.6 C11.1 ; R9.2 45.5,117.15 45.775,117.425 45.775,117.836 46.039,118.1 47.411,118.1 47.775,117.736 47.775,117.3 C13.2 R12.1 ; R1.2 51.975,109.375 51.425,109.925 51.364,109.925 51.1,110.189 51.1,111.561 51.364,111.825 51.6,111.825 52.1,112.325 v1(52.15,112.325) 52.112,112.363 52.112,113.913 R4.1 ; R13.2@70.475,91.425 v1(70.475,91.375) 70.674,91.574 70.674,92.299 71.125,92.75 72.646,92.75 ; v1(73.619,91.895) 73.349,91.895 72.749,92.495 72.749,96.314 73.975,97.54 X8.6 ; v1@74.15,111.625 74.275,111.75 74.275,112.95 74.375,113.05 X11.4
  other v1: 29,83.95 32.9,83.95 41.5,84.475 70.475,85.05 32.9,85.25 28.975,85.3 73.619,85.495 63.4,85.825 29,86.525 32.9,86.55 57.8,86.675 58.6,86.675 62.6,86.7 63.375,86.7 69.9,102.7 48,104.575 61,107.75 27.1,109 28.05,109.075 30.125,109.125 29.375,109.15 32.275,109.3 31.3,109.325 42.7,113.625 42.7,114.525 40.2,117.95 51.35,129.5 62.3,129.525 41.725,132.15 49.95,132.225 68.075,132.46 68.075,133.73 71.975,133.73 59.025,133.975 61.55,134.175 68.075,135
  other v2: 48.175,132.567
NetC3_1: C3.1 R2.2 | length 2.4
  Bottom Layer w0.15: R2.2 52.15,110.875 53.175,111.9 53.425,111.9 C3.1
NetC4_1: C4.1 L1.1 U1.3 VD1.2
NetC4_2: C4.2 U1.1 | length 2.6
  Bottom Layer w0.15: U1.1 63.07,112.88 63.5,112.45 C4.2
NetC8_1: C8.1 R6.2 | length 1.7
  Top Layer w0.15: R6.2 64.875,114.55 C8.1
NetC9_1: C9.1 L2.1 U2.3 VD2.2
NetC9_2: C9.2 U2.1 | length 2.5
  Top Layer w0.15: C9.2 51.955,115.755 U2.1
NetC13_1: C13.1 R10.2 | length 2.2
  Bottom Layer w0.15: R10.2 47.15,116.675 47.15,116.343 47.45,116.043 47.45,115.975 47.975,115.45 C13.1
NetC14_1: C14.1 L3.1 U3.3 VD3.2
NetC14_2: C14.2 U3.1 | length 2.3
  Bottom Layer w0.15: C14.2 48.205,106.405 U3.1
NetC18_1: C18.1 R17.2 X2.2 | length 19.4
  Top Layer w0.15: C18.1@60.225,132.6 60.625,133 60.737,133 60.825,133.088 60.825,133.118 60.957,133.25 62.143,133.25 62.275,133.118 62.275,131.832 62.23,131.787 R17.2@62.23,131.43 ; R17.2 R17.2@62.23,131.43 ; X2.2 74.325,129.925 73.534,130.716 73.534,131.174 72.848,131.86 70.915,131.86 69.79,132.985 63.492,132.985 62.75,132.243 62.75,131.883 62.442,131.575 62.375,131.575 R17.2@62.23,131.43
NetC18_2: C18.2 U5.22 | length 12.1
  Top Layer w0.15: U5.22@48.775,134.205 49.045,134.475 49.045,134.553 49.177,134.685 53.673,134.685 53.933,134.425 58.107,134.425 58.432,134.75 59.85,134.75 C18.2@60.225,134.375
NetC19_1: C19.1 C20.1 R19.1 | length 4.3
  Top Layer w0.15: R19.1 63.875,129.6 C20.1 C19.1
NetC19_2: C19.2 U5.26 | length 21.3
  Top Layer w0.15: U5.26@46.175,133.8 46.175,134.38 46.395,134.6 46.395,134.678 46.842,135.125 48.768,135.125 48.993,135.35 62.317,135.35 62.392,135.275 64.837,135.275 65.075,135.037 65.075,134.875 65.85,134.1 C19.2@65.875,134.1
NetC20_2: C20.2 U5.25 | length 18.6
  Top Layer w0.15: U5.25@46.825,133.8 46.955,133.93 46.955,134.588 47.092,134.725 48.793,134.725 48.893,134.825 49.118,135.05 62.193,135.05 62.343,134.9 62.459,134.784 62.459,134.391 62.775,134.075 C20.2@63.9,134.075
NetC26_1: C26.1 R23.2 R24.1 U10.3 | length 7.3
  Top Layer w0.15: U10.3 50.035,90.285 50.55,90.8 C26.1 50.925,90.475 R24.1 52.775,88.85 R23.2
NetC26_2: C26.2 R26.1 R28.1 U10.2 | length 8.7
  Top Layer w0.15: R28.1 45.4,86.125 45.825,86.55 45.825,87.815 47.025,89.015 U10.2 47.66,89.15 C26.2 50.525,89.125 R26.1
NetC27_2: C27.2 U5.5 Z1.2 | length 16.6
  Top Layer w0.15: U5.5 47.655,127.795 47.655,127.137 48.177,126.615 57.083,126.615 58.743,128.275 Z1.2 60.625,127.875 62.25,127.875 C27.2
NetC28_2: C28.2 U5.6 Z1.1 | length 11.4
  Top Layer w0.15: U5.6 48.175,127.345 48.395,127.125 48.395,127.047 48.527,126.915 55.065,126.915 56.225,128.075 Z1.1 54.8,128.275 C28.2
NetC30_1: C30.1 R24.2 R25.2 X24.1
NetR1_1: R1.1 R3.2 U1.6 | length 4.3
  Bottom Layer w0.15: R3.2 53.75,109.35 R1.1 54.925,109.375 55.665,110.115 U1.6@56.35,110.115
NetR2_1: R2.1 U1.7 | length 2.8
  Bottom Layer w0.15: R2.1 53.85,110.875 54.36,111.385 U1.7@56.35,111.385
NetR4_2: R4.2 U1.8 | length 3.1
  Bottom Layer w0.15: R4.2 53.825,113.95 55.12,112.655 U1.8@56.35,112.655
NetR5_1: R5.1 R7.2 U2.6 | length 4.3
  Top Layer w0.15: U2.6 61.56,113.215 61.625,113.15 61.625,111.725 R7.2@61.675,111.675
NetR6_1: R6.1 U2.7 | length 2.8
  Top Layer w0.15: U2.7 61.56,114.485 R6.1
NetR8_2: R8.2 U2.8 | length 2.8
  Top Layer w0.15: U2.8 61.58,115.755 R8.2
NetR9_1: R9.1 R11.2 U3.6 | length 3.4
  Bottom Layer w0.15: R11.2 R9.1@45.475,115.35 ; U3.6@45.49,113.975 R9.1@45.49,115.35 ; R9.1@45.515,115.4 R9.1@45.515,115.86
NetR10_1: R10.1 U3.7 | length 1.4
  Bottom Layer w0.15: R10.1@46.65,115.375 46.76,115.265 46.76,114.132 46.764,114.128 46.764,113.979 U3.7@46.76,113.975
NetR12_2: R12.2 U3.8 | length 2.6
  Bottom Layer w0.15: U3.8 48.205,113.863 48.423,114.081 48.556,114.081 49.125,114.65 R12.2@49.125,115.35
NetR13_1: R13.1 X21.A5 | length 3.3
  Bottom Layer w0.15: R13.1 72.811,89.675 72.956,89.82 72.995,89.82 73.045,89.87 73.544,89.87 X21.A5
NetR14_2: R14.2 U5.18 | length 7.8
  Top Layer w0.15: U5.18@51.375,134 51.375,133.42 51.595,133.2 51.595,132.78 53.541,130.834 53.666,130.834 53.683,130.85 56.062,130.85 56.15,130.938 56.15,131.7 R14.2@56.375,131.925
NetR15_2: R15.2 U5.17 | length 4.4
  Top Layer w0.15: U5.17@52.155,133.87 52.155,133.015 52.295,132.875 52.295,132.797 52.427,132.665 52.702,132.665 53.167,132.2 54.925,132.2 R15.2
NetR16_2: R16.2 U5.12 | length 11.1
  Top Layer w0.15: R16.2@43.65,132.1 45.784,132.1 45.94,131.945 45.984,131.901 47.768,131.392 48.688,131.345 48.769,131.423 49.295,131.95 49.483,131.95 50.674,130.759 50.834,130.759 52.025,129.567 U5.12@52.025,128.25
NetR18_1: R18.1 X21.B5 | length 3.4
  Bottom Layer w0.15: R18.1 70.9,87.175 72.851,87.175 72.956,87.07 73.074,87.07 73.199,86.945 X21.B5
NetR19_2: R19.2 X6.2 | length 38.6
  Bottom Layer w0.15: X6.2 37.31,129.185 37.6,129.475 50.013,129.475 51.988,127.5 v2@64.4,127.5
  other v2: 64.25,127.525
NetR20_1: R20.1 R22.2 X10.17 | length 4.3
  Top Layer w0.15: R20.1 R22.2 66.672,97.75 66.752,97.83 67.95,97.83 X10.17
NetR21_1: R21.1 U5.19 | length 9.9
  Top Layer w0.15: U5.19@50.867,133.858 50.867,132.758 53.091,130.534 53.791,130.534 53.807,130.55 57.025,130.55 57.725,131.25 R21.1
NetR27_1: R27.1 U10.8 | length 1.6
  Top Layer w0.15: R27.1 41.5,87.72 U10.8
NetR28_2: R28.2 U10.6 X10.15 | length 75.2
  Top Layer w0.15: R28.2 43.65,88.66 42.025,90.285 U10.6 37.592,90.285 37.025,89.718 37.025,85.058 38.598,83.485 74.819,83.485 75.424,84.09 75.424,87.401 74.275,88.55 70,88.55 69.425,89.125 69.425,98.198 69.025,98.598 69.025,99.1 68.875,99.25 X10.15
NetU5_8: U5.8 X3.24 | length 22.4
  Top Layer w0.15: X3.24 34.485,121.03 34.529,121.074 ; 34.529,121.074 34.535,121.08 cw(c35.3,120.475) 35.153,121.439 36.831,123.117 36.875,123.161 36.875,125.475 cw(c37.85,125.475) 37.741,126.444 37.743,126.444 ccw(c37.726,126.593) 37.833,126.487 39.245,127.9 44.144,127.9 44.495,128.251 44.495,128.803 44.627,128.935 46.364,128.935 48.424,128.935 49.123,128.935 49.345,128.713 49.345,128.055 U5.8
NetU5_9: U5.9 X3.20 | length 21.1
  Top Layer w0.15: X3.20 34.467,123.57 34.526,123.57 34.621,123.665 cw(c35.31,122.975) 35.151,123.937 35.714,124.501 36.285,125.071 36.285,125.535 36.647,125.897 cw(c37.85,125.475) 37.428,126.678 38.95,128.2 44.019,128.2 44.195,128.376 44.195,128.927 44.503,129.235 46.489,129.235 48.299,129.235 49.247,129.235 49.547,128.935 49.773,128.935 49.995,128.713 49.995,128.055 U5.9
NetU5_10: U5.10 X3.22 | length 26.3
  Top Layer w0.15: X3.22 32.125,122.3 31.05,123.375 31.05,124.533 32.177,125.66 34.116,125.66 37.991,129.535 49.823,129.535 50.645,128.713 50.645,128.055 U5.10
NetU5_11: U5.11 X3.18 | length 38
  Top Layer w0.15: X3.18 32.125,124.84 31.975,124.69 31.975,124.188 31.675,123.888 31.675,123.252 31.807,123.12 33.623,123.12 34.425,122.318 34.425,121.513 34.337,121.425 34.048,121.425 33.993,121.48 30.763,121.48 30.675,121.568 30.675,125.525 32,126.85 33.913,126.85 36.898,129.835 50.173,129.835 51.205,128.803 51.205,128.725 51.425,128.505 U5.11
NetX1_2: X1.2 X9.27 | length 12.3
  Top Layer w0.15: X1.2 26.375,89.265 25.75,88.64 25.75,87.522 25.882,87.39 27.668,87.39 27.688,87.37 30.093,87.37 30.525,87.802 30.525,90.88 29.775,91.63 X9.27
NetX1_3: X1.3 X9.29 | length 6.1
  Top Layer w0.15: X1.3@26.95,88.025 27.35,88.025 27.887,88.562 30.015,88.562 30.225,88.772 30.225,89.408 29.974,89.659 29.251,89.659 29,89.91 X9.29
NetX3_17: X3.17 X5.2 | length 7.1
  Top Layer w0.15: X5.2 27.125,130.35 27.762,129.713 27.762,125.804 28.075,125.492 28.075,124.99 28.225,124.84 X3.17
NetX3_19: X3.19 X5.3 | length 8
  Top Layer w0.15: X5.3 26.325,129.1 25.7,128.475 25.7,127.25 27.762,125.188 27.762,124.534 28.075,124.222 28.075,123.72 28.225,123.57 X3.19
NetX3_25: X3.25 X23.2 | length 2.5
  Top Layer w0.15: X23.2 27.15,119.225 27.69,119.225 28.225,119.76 X3.25
NetX3_27: X3.27 X23.3 | length 2.5
  Top Layer w0.15: X23.3 27.15,117.975 27.71,117.975 28.225,118.49 X3.27
NetX3_29: X3.29 X23.4 | length 2.5
  Top Layer w0.15: X23.4 27.15,116.725 27.73,116.725 28.225,117.22 X3.29
NetX3_31: X3.31 X23.5 | length 2.5
  Top Layer w0.15: X23.5 27.15,115.475 27.75,115.475 28.225,115.95 X3.31
NetX3_33: X3.33 X23.6 | length 2.5
  Top Layer w0.15: X23.6 27.15,114.225 27.77,114.225 28.225,114.68 X3.33
NetX4_7: X4.7 X20.1 | length 12
  Top Layer w0.15: X20.1 66.85,121.545 66.85,130.238 67.058,130.447 67.707,130.447 68,130.74 68,131.075 v1(68.05,131.125)
NetX4_8: X4.8 X16.1 | length 2.9
  Bottom Layer w0.15: v1(71.9,131.16) 74.55,131.16 74.615,131.225 X16.1
NetX4_9: X4.9 X20.2 | length 14.6
  Layer 2 w0.15: X20.2 64.215,119.5 66.184,119.5 66.755,120.071 66.755,122.561 66.765,122.571 66.765,128.615 v1(68.075,129.925)
NetX4_10: X4.10 X16.2 | length 2.8
  Bottom Layer w0.15: v1(71.925,129.875) 74.715,129.875 X16.2
NetX4_11: X4.11 X20.3 | length 16.4
  Layer 2 w0.15: X20.3 61.861,120.475 62.836,119.5 63.791,119.5 64.091,119.2 66.308,119.2 67.055,119.947 67.055,122.437 67.065,122.447 67.065,127.84 v1(68,128.775)
NetX4_12: X4.12 X16.3 | length 2.8
  Bottom Layer w0.15: v1(71.9,128.65) 74.69,128.65 X16.3
NetX4_13: X4.13 X20.4 | length 18.1
  Layer 2 w0.15: X20.4 59.135,119.5 62.412,119.5 62.712,119.2 63.666,119.2 63.966,118.9 66.432,118.9 67.355,119.823 67.355,120.176 67.355,120.671 68.125,121.441 v1(68.125,127.4)
NetX4_14: X4.14 X16.4 | length 2.8
  Bottom Layer w0.15: v1(71.95,127.45) 74.64,127.45 X16.4
NetX4_15: X4.15 X20.5 | length 19.7
  Bottom Layer w0.15: X20.5 56.845,119.25 67.175,119.25 67.625,119.7 67.625,124.267 68.925,125.567 v1(68.925,126.15)
NetX4_16: X4.16 X16.5 | length 2.8
  Bottom Layer w0.15: v1(71.95,126.125) 74.715,126.125 X16.5
NetX4_17: X4.17 X20.6 | length 21.4
  Bottom Layer w0.15: X20.6 54.605,118.95 67.299,118.95 68.05,119.701 68.05,123.95 v1(68.925,124.825)
NetX4_18: X4.18 X16.6 | length 2.8
  Bottom Layer w0.15: v1(71.9,124.875) 74.715,124.875 X16.6
NetX4_19: X4.19 X20.7 | length 23.2
  Bottom Layer w0.15: X20.7 52.365,118.65 67.424,118.65 68.35,119.576 68.35,122.708 v1(69.175,123.533)
NetX4_21: X4.21 X20.8 | length 25
  Bottom Layer w0.15: X20.8 50.15,118.325 67.523,118.325 68.65,119.452 68.65,121.292 68.875,121.517 v1(68.875,122.35)
NetX4_23: X4.23 X20.9 | length 27.7
  Top Layer w0.15: X20.9 45.46,118.59 45.85,118.2 52.104,118.2 52.134,118.23 55.716,118.23 55.746,118.2 65.726,118.2 66.85,119.324 66.85,120.078 67.15,120.378 67.15,120.88 67.3,121.03 X4.23 68.12,121.075 v1(69.175,121.075)
NetX4_24: X4.24 X15.2 | length 9.5
  Top Layer w0.15: v1(71.9,121.075) 72.705,121.075 75.3,118.48 75.3,117.703 75.7,117.303 75.7,114.935 75.075,114.31 X15.2
NetX4_25: X4.25 X20.10 | length 28.3
  Top Layer w0.15: X20.10 45.495,117.9 52.228,117.9 52.258,117.93 55.592,117.93 55.622,117.9 65.85,117.9 67.185,119.235 67.185,119.61 67.335,119.76 69.165,119.76 v1(69.175,119.75)
NetX4_26: X4.26 X15.3 | length 6.1
  Top Layer w0.15: v1(71.925,119.775) 72.735,119.775 72.9,119.61 72.9,119.108 73.425,118.583 73.425,116.41 74.275,115.56 X15.3
NetX4_27: X4.27 X20.11 | length 30
  Top Layer w0.15: X20.11 41.762,119.093 43.877,119.093 45.371,117.6 52.353,117.6 52.383,117.63 55.467,117.63 55.497,117.6 65.974,117.6 66.874,118.5 68.065,118.5 X4.27 68.085,118.5 v1(68.825,118.5)
NetX4_28: X4.28 X11.2 | length 4.3
  Bottom Layer w0.15: v1(71.95,118.525) 73.006,117.469 73.006,116.844 74.3,115.55 X11.2
NetX4_29: X4.29 X20.12 | length 32.6
  Top Layer w0.15: X20.12 39.522,118.793 43.753,118.793 45.246,117.3 52.477,117.3 52.507,117.33 55.343,117.33 55.373,117.3 66.099,117.3 66.381,117.582 66.938,117.582 67.3,117.22 X4.29 68.105,117.25 v1(68.8,117.25)
NetX4_30: X4.30 X11.3 | length 4.3
  Bottom Layer w0.15: v1(71.925,117.25) 71.925,116.675 74.3,114.3 X11.3
NetX4_31: X4.31 X20.13 | length 35.4
  Top Layer w0.15: X20.13 37.3,118.475 43.647,118.475 45.122,117 52.601,117 52.631,117.03 55.219,117.03 55.249,117 66.25,117 67.3,115.95 v1(68.8,115.95)
NetX7_2: X7.2 X9.23 | length 7.8
  Bottom Layer w0.15: X7.2 27.175,88.035 29.525,90.385 29.525,93.775 v1(29.025,94.275)
NetX7_3: X7.3 X9.25 | length 4.8
  Bottom Layer w0.15: X7.3 27.175,89.285 29,91.11 v1(29,92.95)
NetX8_2: X8.2 X10.10 | length 2.6
  Bottom Layer w0.15: v1(72,103.05) 72.51,102.54 X8.2
NetX8_3: X8.3 X10.12 | length 2.6
  Bottom Layer w0.15: v1(71.975,101.8) 72.485,101.29 X8.3
NetX8_4: X8.4 X10.14 | length 2.6
  Bottom Layer w0.15: v1(72,100.55) 72.51,100.04 X8.4
NetX8_5: X8.5 X10.16 | length 2.6
  Bottom Layer w0.15: v1(72.025,99.275) 72.147,99.275 72.307,99.115 74.05,99.115 X8.5
NetX9_6: X9.6 X12.2 | length 15.4
  Bottom Layer w0.15: X12.2 33.687,113.81 33.775,113.722 33.775,106.475 v1(32.925,105.625)
NetX9_8: X9.8 X12.3 | length 18.4
  Bottom Layer w0.15: X12.3 33.987,115.06 34.075,114.972 34.075,106.033 32.9,104.858 v1(32.9,104.3)
NetX9_9: X9.9 X19.3 | length 2.4
  Bottom Layer w0.15: X19.3 27.2,102.285 27.89,102.975 v1(28.95,102.975)
NetX9_10: X9.10 X12.4 | length 21.5
  Bottom Layer w0.15: X12.4 26.995,116.455 34.287,116.455 34.375,116.367 34.375,104.55 v1(32.925,103.1)
NetX9_11: X9.11 X19.2 | length 2.3
  Bottom Layer w0.15: X19.2 27.2,101.035 27.915,101.75 28.732,101.75 v1(28.76,101.778)
NetX9_12: X9.12 X12.5 | length 24.2
  Bottom Layer w0.15: X12.5 34.512,117.56 34.675,117.397 34.675,103.525 v1(32.925,101.775)
NetX9_24: X9.24 X14.2 | length 14.2
  Top Layer w0.15: X14.2 30.078,103.525 31.425,102.178 31.425,95.372 31.926,94.871 32.649,94.871 32.9,94.62 X9.24
NetX9_26: X9.26 X14.3 | length 14.3
  Top Layer w0.15: X14.3 28.515,102.275 28.543,102.303 28.977,102.303 29.005,102.275 30.058,102.275 31.125,101.208 31.125,95.248 31.675,94.698 31.675,93.852 31.975,93.552 31.975,93.05 32.125,92.9 X9.26
NetX9_28: X9.28 X14.4 | length 14.2
  Top Layer w0.15: X14.4 26.855,100.97 30.093,100.97 30.825,100.238 30.825,95.123 31.375,94.573 31.375,93.728 31.634,93.468 31.634,92.623 31.926,92.331 32.649,92.331 32.9,92.08 X9.28
NetX9_30: X9.30 X14.5 | length 14.3
  Top Layer w0.15: X14.5 30.018,99.775 30.525,99.268 30.525,94.999 31.075,94.449 31.075,93.603 31.334,93.344 31.334,91.653 31.975,91.012 31.975,90.51 32.125,90.36 X9.30
NetX9_32: X9.32 X14.6 | length 14.3
  Top Layer w0.15: X14.6 28.728,98.525 28.823,98.43 30.093,98.43 30.225,98.298 30.225,94.875 30.775,94.325 30.775,93.479 31.034,93.22 31.034,90.683 31.975,89.742 31.975,89.24 32.125,89.09 X9.32
NetX10_22: X10.22 X13.2 | length 6.3
  Top Layer w0.15: X10.22 72.775,95.44 72.925,95.59 72.925,96.092 73.287,96.454 73.287,99.372 73.975,100.06 X13.2
NetX10_24: X10.24 X13.3 | length 10.7
  Top Layer w0.15: X10.24 72.042,94.212 73.137,94.212 75.55,96.625 75.55,98.05 75.55,98.112 75.638,98.2 75.725,98.2 ccw(c75.725,98.825) 76.315,99.03 75.925,100.16 74.775,101.31 X13.3
SERVO_OUT: C15.2 L3.2 R11.1 X17.1 X17.2 X17.3 X17.4 X17.5 X17.6 X17.7 X17.8 X17.9 X17.10 X17.11 X17.12 X17.13
VCC: C1.2 C2.2 C6.2 C7.2 C11.2 C12.2 C24.2 C25.2 R22.1 U1.2 U1.5 U2.2 U2.5 U3.2 U3.5 VD4.2 X3.1 X3.2 X3.3 X3.4 X3.5 X3.6 X6.1 X10.35 X10.36 X10.37 X10.38 X10.39 X10.40 X22.1 X24.2 | length 111.4
  Top Layer w0.6: C24.2@40.788,102.537 42.442,100.883 44.392,100.883 X22.1 45.95,96.675 45.5,96.225 45.2,96.225 44.4,95.425 VD4.2 ; C24.2@40.8,102.625 C25.2@40.8,105.075 ; C6.2 C6.2@48.05,113.05 ; C7.2@49.325,111.5 48.55,112.275 48.55,112.55 C6.2@48.05,113.05 ; C7.2 49.6,111.225 v1(49.6,108.225) ; U2.2 U2.2@54.61,114.485 ; U2.5 58.19,111.945 57,113.135 57,114.134 56.649,114.485 U2.2@54.61,114.485 ; v3(64.4,96.1) 64.45,96.05 64.45,89.575 67.475,86.55 v3(68.1,86.55) 68.125,86.55 X10.39@68.125,84.01 ; v3@64.45,96.15 65.725,96.15 R22.1 ; X10.39@68.135,84.01 v3(72,84.01) v1(72,86.525) ; C6.2@48.05,113.05 49.732,114.732 49.732,115.218 50.989,116.475 52.819,116.475 52.849,116.505 55.002,116.505 55.36,116.146 55.36,115.235 U2.2@54.61,114.485
  Bottom Layer w0.6: X6.1 26.35,127.935 25.95,128.335 25.764,128.335 25.5,128.599 25.5,131.449 25.8,131.749 25.8,131.875 v1@28.951,135.026 ; C11.2 48.839,103.45 51.864,106.475 ; U3.5 44.395,111.519 45.864,110.05 46.584,110.05 46.935,109.699 U3.2 ; U3.2@47.134,109.159 47.685,109.71 48.596,109.71 49.021,109.286 49.021,108.904 49.65,108.275 C12.2 49.65,108.175 50.3,107.525 50.814,107.525 51.864,106.475 ; U1.5 U1.5@56.885,109.07 ; C2.2 57.975,104.475 57.575,104.875 C1.2 ; U1.2 58.74,111.61 57.635,110.505 57.635,109.949 57.277,109.59 57.236,109.59 56.885,109.239 U1.5@56.885,109.07 ; 51.864,106.475 C1.2 ; U1.5@56.885,109.07 57.575,108.38 C1.2
  other v1: 32.595,131.895 32.925,133.7 32.925,134.95 29,134.975
  other v2: 39.975,103.4
  other v3: 68.1,84.01 68.1,85.28 72,85.28
pads on no net: U5.1 U5.2 U5.7 U5.13 U5.14 U5.15 U5.16 U5.27 U5.28 U10.1 U10.5 X1.S X2.S X3.15 X3.16 X3.21 X3.23 X3.26 X3.28 X3.30 X3.32 X3.34 X3.35 X3.36 X4.20 X4.22 X4.32 X4.33 X4.34 X4.35 X4.36 X5.S X6.S X7.S X8.S X9.5 X9.7 X9.13 X9.14 X9.15 X9.16 X9.17 X9.18 X9.19 X9.20 X9.21 X9.22 X9.31 X9.33 X9.34 X10.5 X10.6 X10.7 X10.8 X10.9 X10.11 X10.13 X10.18 X10.19 X10.20 X10.21 X10.23 X10.25 X10.26 X11.S X12.S X13.S X14.S X15.S X16.S X19.S X21. X21.A6 X21.A7 X21.A8 X21.B6 X21.B7 X21.B8 X21.S1 X21.S2 X21.S3 X21.S4 X22.S1 X22.S2 X23.S X24.S1 X24.S2

## Polygon pours and split planes (outlines as drawn)
GND on Top Layer "NONET_L-01_P-001" (solid, pour order 22): 79.325,82.9 79.3,82.925 22.25,82.925 22.25,135.475 22.275,135.5 79.325,135.5
NetC30_1 on Top Layer "NONET_L-01_P-001" (solid, pour order 21): 52.7,102.15 52.775,102.075 52.775,89.75 62.1,89.75 64.1,91.75 64.1,102.125
GND on Top Layer "GND_L01_P006" (solid, pour order 6): 67.025,112.425 67.025,101.45 75.5,101.45 75.5,112.425
NetC9_1 on Top Layer "NETC9_1_L01_P018" (solid, pour order 18): 55.15,112.625 54.975,112.8 51.875,112.8 51.875,110.975 53.3,109.55 53.2,109.45 53.2,102.8 50.35,102.8 49.975,103.175 49.975,105.8 47.7,105.8 46.675,106.825 46.675,110.025 51.125,114.475 55.05,114.475
4V2 on Top Layer "4V2_L01_P016" (solid, pour order 16): 55.35,103 55.375,103.025 57.175,103 60.175,103.025 60.175,108.85 60.225,108.8 63.975,108.8 64.125,108.95 64.125,112.35 62.375,112.35 62.4,112.325 62.4,110.9 55.8,110.9 55.325,110.425 55.375,110.375 55.375,103.2
GND on Top Layer "GND_L01_P005" (solid, pour order 5): 26,113.15 25.95,113.1 25.95,105.925 37.175,105.925 37.175,113.15
VCC on Top Layer "VCC_L01_P002" (solid, pour order 2): 34.225,131.95 28,131.95 28,134.9 28,135.5 34.225,135.5
VCC on Layer 1 "VCC_L02_P019" (solid, pour order 19): 35.875,102.15 35.875,93.45 76.475,93.45 76.475,130.3 39.5,130.3 39.5,135 38.9,135.6 38.8,135.5 27.7,135.5 27.7,132.025 28.2,131.525 34.7,131.525 34.7,126.725 35.025,126.4 66.575,126.4 66.575,102.15
GND on Layer 1 "GND_L02_P007" (solid, pour order 7): 79.35,82.925 79.325,82.9 56.675,82.9 57.674,90.864 79.323,94.443
SERVO_OUT on Layer 1 "SERVO_OUT_L02_P000" (solid, pour order 0): 66.6,124 66.575,123.975 66.575,121.95 34.475,121.95 34.475,123.975
NetC4_1 on Bottom Layer "NETC4_1_L04_P001" (solid, pour order 1): 59.975,110.9 59.925,110.85 59.925,109.7 62.2,109.7 62.225,109.675 62.15,109.6 62.15,105.425 64.675,105.425 65,105.425 65.05,106.3 65.05,110.525 73.275,110.525 73.275,114.65 65.075,114.65 65,114.725 65,111.675 62.8,111.675 62.675,111.55 62.675,111.025 60,111.025 59.95,110.975
GND on Bottom Layer "GND_L04_P012" (solid, pour order 12): 22.25,82.9 79.325,82.9 79.325,135.5 22.25,135.5
SERVO_OUT on Bottom Layer "SERVO_OUT_L04_P013" (solid, pour order 13): 44.6,118.95 44.65,118.9 44.65,116.425 42.675,116.425 42.2,115.95 42.2,113.275 35.15,113.275 35.075,113.35 34.176,117.889 33.142,118.483 32.972,123.975 67.225,123.975 67.3,123.9 67.3,122.125 46.278,122.125
NetC14_1 on Bottom Layer "NETC14_1_L04_P015" (solid, pour order 15): 35.225,111.05 35.2,111.025 35.2,105.15 47,105.15 47.025,105.125 47.05,105.15 47.05,106.65 46.925,106.65 46.325,107.25 46.325,109.25 45.175,109.25 45.1,109.325 45.1,107.025 43.175,107.025 43.175,111.05
5V on Bottom Layer "5V_L04_P014" (solid, pour order 14): 65.525,109.475 65.525,104.625 75.4,104.625 75.4,109.4
4V2 on Layer 2 "4V2_L03_P020" (solid, pour order 20): 27.975,129.1 27.925,129.05 27.925,127.125 27.975,106.125 55.05,106.125 55.35,105.825 55.35,102.85 57.75,102.85 57.85,102.95 57.85,89.75 72.9,89.75 73.075,89.575 73.125,89.625 73.125,108.8 69.475,112.45 54.075,112.45 54.075,115.1 52.575,115.1 48.35,115.1 33.575,115.1 33.575,129.222

## Silkscreen, mask and mechanical layers (free items; w line width, h text height)
Mechanical 1:
  lines w0.254: 22.25,82.9 79.325,82.9 79.325,135.5 76.3,135.5 76.3,134.5 73.85,134.5 73.85,135.5 22.25,135.5 22.25,82.9

## Text inside footprints (layer, text, board x,y; h text height)
L1: Mechanical 13 "Check!" at 69.475,114.05 h1.52 r90
L2: Mechanical 13 "Check!" at 50.775,105.95 h1.52
L3: Mechanical 13 "Check!" at 38.1,108.825 h1.52 r270
X21: Mechanical 13 "PCB EDGE" at 80.269,83.495 h0.61 r90